# EAGLE board SparkFun_Qwiic_Distance - VL53L4CD-Panel (EAGLE 9.5.1), part 1 of 3
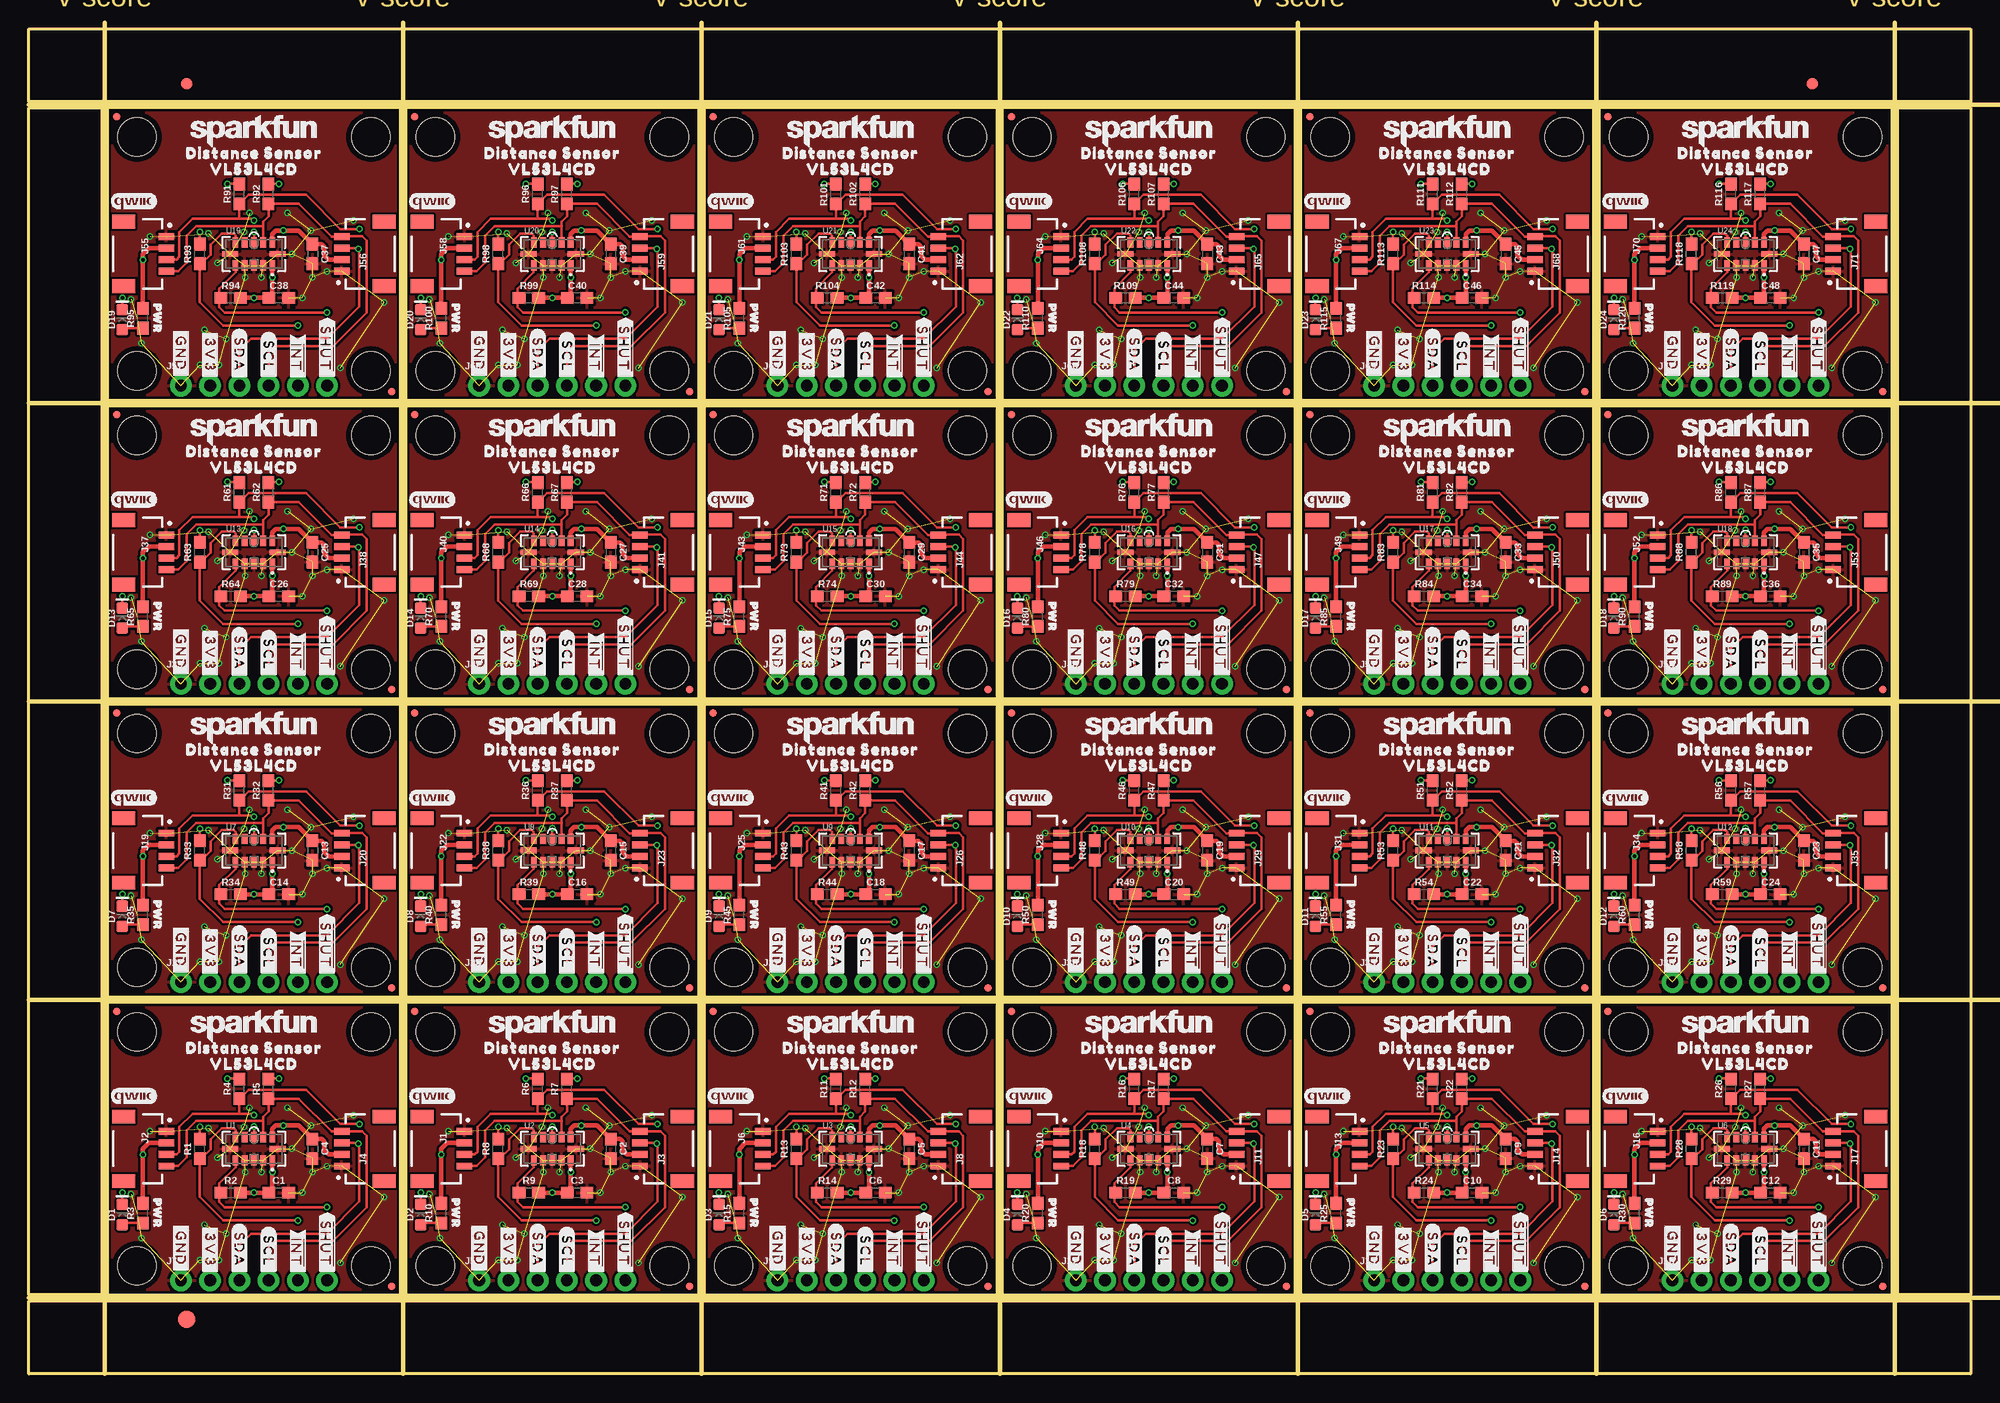
[diagram p0: board, top side]
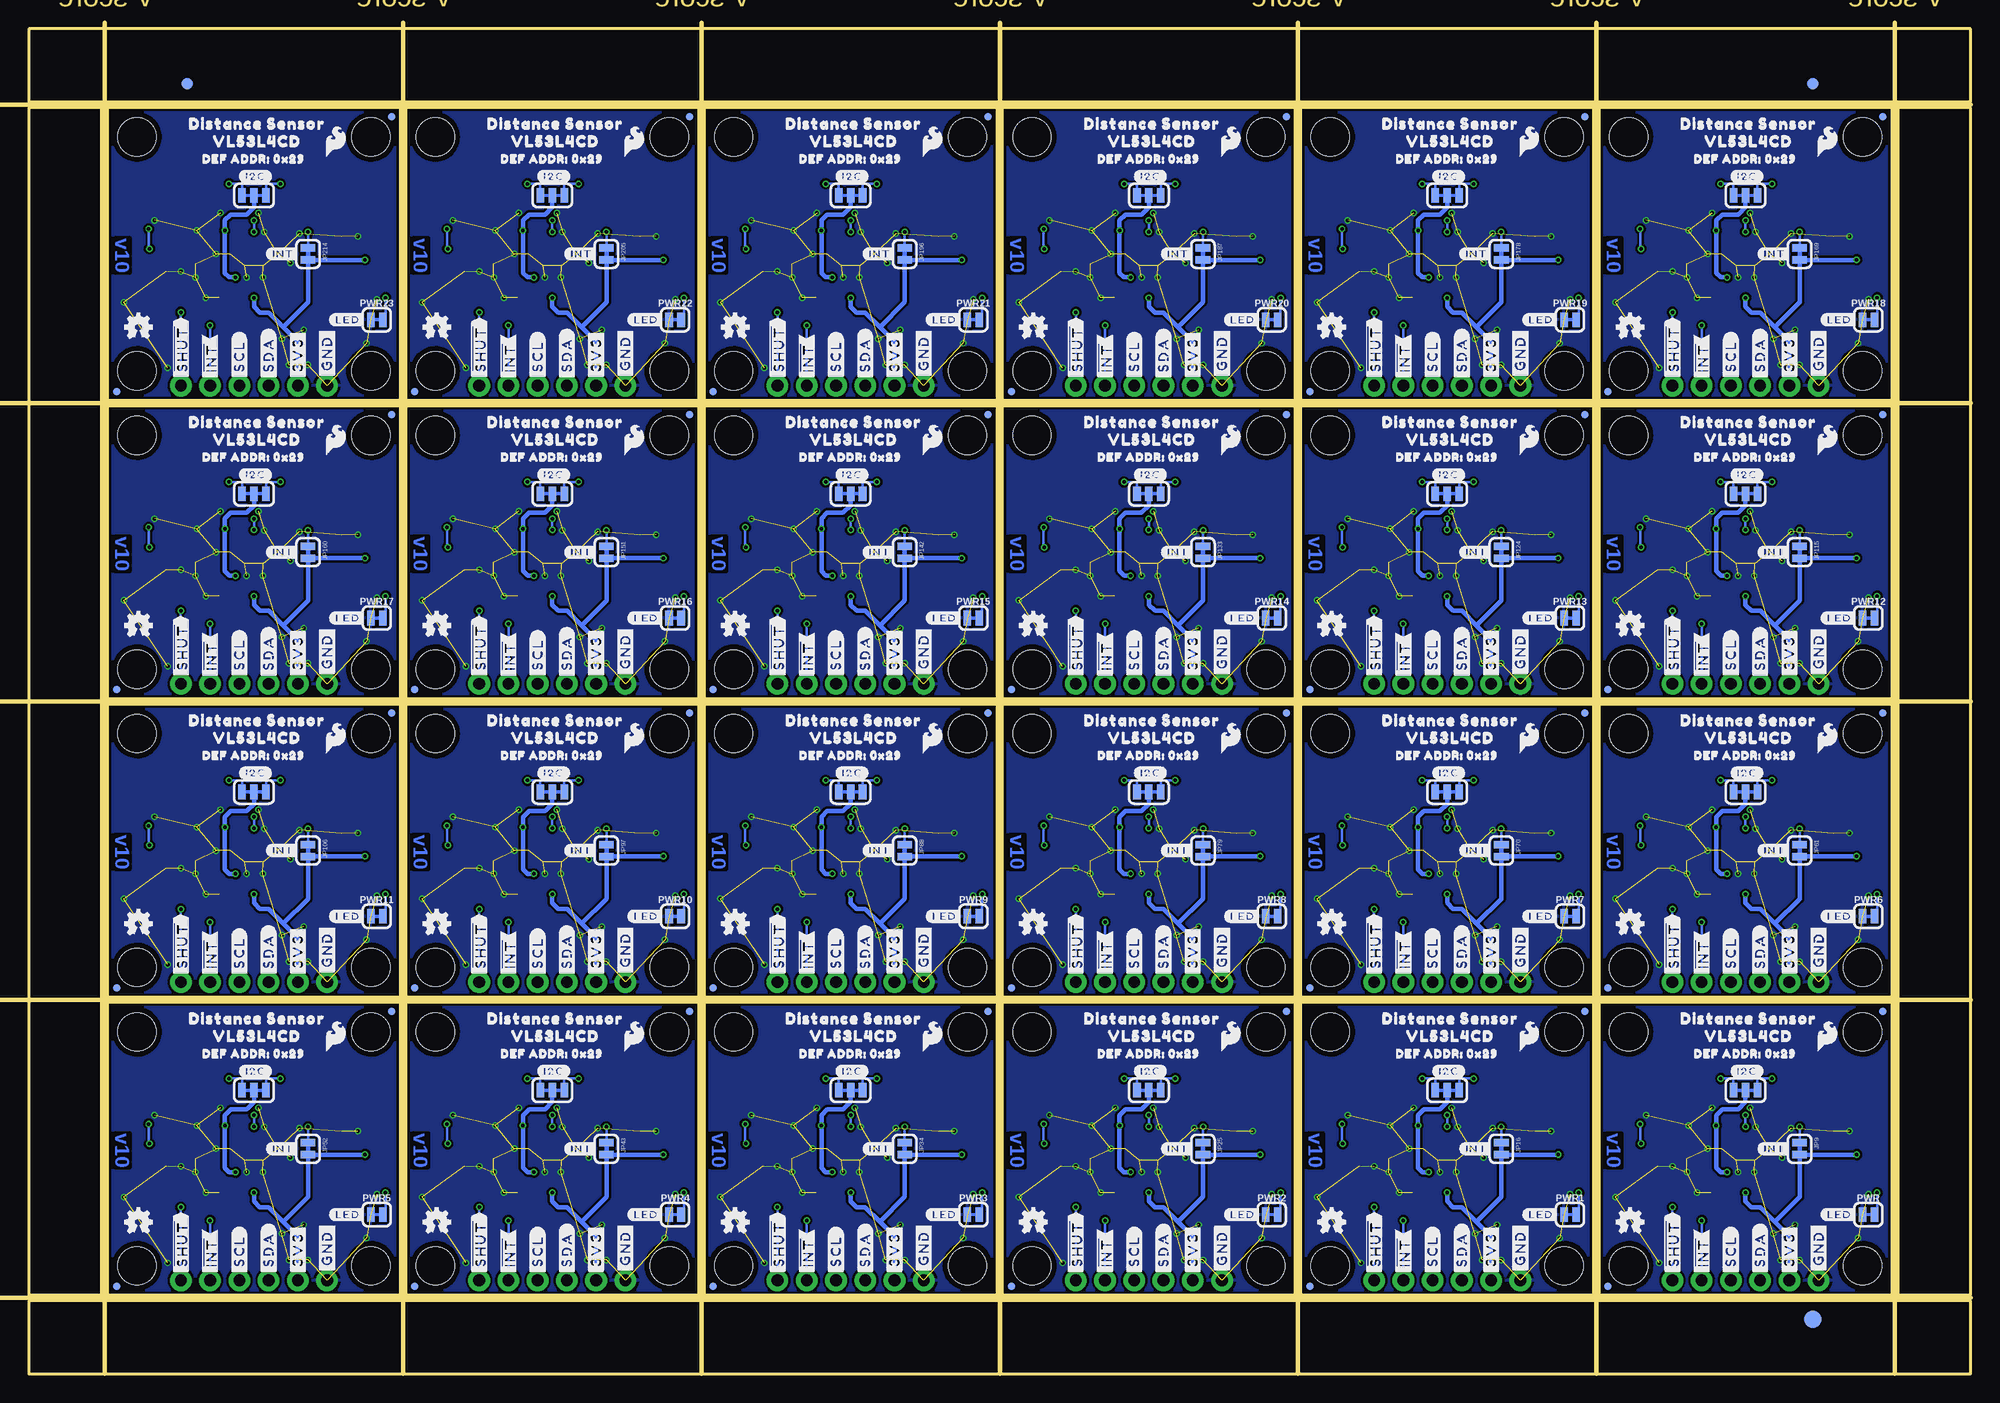
[diagram p1: board, bottom side, seen from below]

Size 168.66 x 116.84 mm. Coordinates in mm from the lower left corner, seen from the top.
Outline: 6.86,6.86 6.86,32.26 32.26,32.26 32.26,6.86 6.86,6.86
Outline: 32.77,6.86 32.77,32.26 58.17,32.26 58.17,6.86 32.77,6.86
Outline: 58.67,6.86 58.67,32.26 84.07,32.26 84.07,6.86 58.67,6.86
Outline: 84.58,6.86 84.58,32.26 109.98,32.26 109.98,6.86 84.58,6.86
Outline: 110.49,6.86 110.49,32.26 135.89,32.26 135.89,6.86 110.49,6.86
Outline: 136.4,6.86 136.4,32.26 161.8,32.26 161.8,6.86 136.4,6.86
Outline: 6.86,32.77 6.86,58.17 32.26,58.17 32.26,32.77 6.86,32.77
Outline: 32.77,32.77 32.77,58.17 58.17,58.17 58.17,32.77 32.77,32.77
Outline: 58.67,32.77 58.67,58.17 84.07,58.17 84.07,32.77 58.67,32.77
Outline: 84.58,32.77 84.58,58.17 109.98,58.17 109.98,32.77 84.58,32.77
Outline: 110.49,32.77 110.49,58.17 135.89,58.17 135.89,32.77 110.49,32.77
Outline: 136.4,32.77 136.4,58.17 161.8,58.17 161.8,32.77 136.4,32.77
Outline: 6.86,58.67 6.86,84.07 32.26,84.07 32.26,58.67 6.86,58.67
Outline: 32.77,58.67 32.77,84.07 58.17,84.07 58.17,58.67 32.77,58.67
Outline: 58.67,58.67 58.67,84.07 84.07,84.07 84.07,58.67 58.67,58.67
Outline: 84.58,58.67 84.58,84.07 109.98,84.07 109.98,58.67 84.58,58.67
Outline: 110.49,58.67 110.49,84.07 135.89,84.07 135.89,58.67 110.49,58.67
Outline: 136.4,58.67 136.4,84.07 161.8,84.07 161.8,58.67 136.4,58.67
Outline: 6.86,84.58 6.86,109.98 32.26,109.98 32.26,84.58 6.86,84.58
Outline: 32.77,84.58 32.77,109.98 58.17,109.98 58.17,84.58 32.77,84.58
Outline: 58.67,84.58 58.67,109.98 84.07,109.98 84.07,84.58 58.67,84.58
Outline: 84.58,84.58 84.58,109.98 109.98,109.98 109.98,84.58 84.58,84.58
Outline: 110.49,84.58 110.49,109.98 135.89,109.98 135.89,84.58 110.49,84.58
Outline: 136.4,84.58 136.4,109.98 161.8,109.98 161.8,84.58 136.4,84.58
Outline: 0,6.35 168.66,6.35 168.66,0 0,0 0,6.35
Outline: 162.31,109.98 168.66,109.98 168.66,6.86 162.31,6.86 162.31,109.98
Outline: 0,116.84 168.66,116.84 168.66,110.49 0,110.49 0,116.84
Outline: 0,109.98 6.35,109.98 6.35,6.86 0,6.86 0,109.98
Copper layers (1*16): Top 0.035mm / dielectric 1.5mm / Bottom 0.035mm
Design rules "SparkFun_Qwiic_Distance - VL53L4CD": minimum track width 4mil, minimum drill 6mil, track to track 4mil, track to pad 4mil, pad to pad 4mil, via to via 4mil, smd to smd 4mil, copper to edge 4mil, drill to drill 4mil, minimum pad ring 5mil, minimum via ring 5mil, stop-mask expansion 4mil, vias tented up to drill 25mil, thermal gap 10mil
Milling: 12 lines

## Footprints (pad centres in the part's own frame; a part is rotated, then mirrored left to right if it is on the bottom)
0603 = smd 1.1 x 1: 1 -0.85,0; 2 0.85,0
LED-0603 = smd 1 x 1: A -0.877,0; C 0.877,0
FIDUCIAL-1X2 = smd 1 x 1: 1 0,0
FIDUCIAL-1.5X3 = smd 1.5 x 1.5: 1 0,0
SMT-JUMPER_3_2-NC_TRACE_SILK = smd 0.66 x 1.27: 1 -1.041,0; 2 0,0; 3 1.041,0
JST04_1MM_RA = smd 0.6 x 1.35: 1 -1.5,0; 2 -0.5,0; 3 0.5,0; 4 1.5,0 | smd 1.2 x 2: NC1 2.8,-3.675; NC2 -2.8,-3.675
1X06_NO_SILK = drill 1.016 pad 1.88: 1 0,0; 2 2.54,0; 3 5.08,0; 4 7.62,0; 5 10.16,0; 6 12.7,0
MICRO-FIDUCIAL = smd 0.635 x 0.635: 1 0,0
STAND-OFF = hole 3.302: 0,0
SMT-JUMPER_2_NC_TRACE_SILK = smd 0.66 x 1.27: 1 -0.521,0; 2 0.521,0
VL53L4CX = smd 0.5 x 0.9: 1 1.6,-1; 2 0.8,-1; 3 0,-1; 4 -0.8,-1; 5 -1.6,-1; 7 -1.6,1; 8 -0.8,1; 9 0,1; 10 0.8,1; 11 1.6,1 | smd 1.4 x 0.5: 6 -2.05,0; 12 2.05,0

## Placement (x,y rotation side)
C1  4.7uF  [0603]  21.72,15.75 0 top
C2  0.1uF  [0603]  50.55,19.56 270 top
C3  4.7uF  [0603]  47.62,15.75 0 top
C4  0.1uF  [0603]  24.64,19.56 270 top
C5  0.1uF  [0603]  76.45,19.56 270 top
C6  4.7uF  [0603]  73.53,15.75 0 top
C7  0.1uF  [0603]  102.36,19.56 270 top
C8  4.7uF  [0603]  99.44,15.75 0 top
C9  0.1uF  [0603]  128.27,19.56 270 top
C10  4.7uF  [0603]  125.35,15.75 0 top
C11  0.1uF  [0603]  154.18,19.56 270 top
C12  4.7uF  [0603]  151.26,15.75 0 top
C13  0.1uF  [0603]  24.64,45.47 270 top
C14  4.7uF  [0603]  21.72,41.66 0 top
C15  0.1uF  [0603]  50.55,45.47 270 top
C16  4.7uF  [0603]  47.62,41.66 0 top
C17  0.1uF  [0603]  76.45,45.47 270 top
C18  4.7uF  [0603]  73.53,41.66 0 top
C19  0.1uF  [0603]  102.36,45.47 270 top
C20  4.7uF  [0603]  99.44,41.66 0 top
C21  0.1uF  [0603]  128.27,45.47 270 top
C22  4.7uF  [0603]  125.35,41.66 0 top
C23  0.1uF  [0603]  154.18,45.47 270 top
C24  4.7uF  [0603]  151.26,41.66 0 top
C25  0.1uF  [0603]  24.64,71.37 270 top
C26  4.7uF  [0603]  21.72,67.56 0 top
C27  0.1uF  [0603]  50.55,71.37 270 top
C28  4.7uF  [0603]  47.62,67.56 0 top
C29  0.1uF  [0603]  76.45,71.37 270 top
C30  4.7uF  [0603]  73.53,67.56 0 top
C31  0.1uF  [0603]  102.36,71.37 270 top
C32  4.7uF  [0603]  99.44,67.56 0 top
C33  0.1uF  [0603]  128.27,71.37 270 top
C34  4.7uF  [0603]  125.35,67.56 0 top
C35  0.1uF  [0603]  154.18,71.37 270 top
C36  4.7uF  [0603]  151.26,67.56 0 top
C37  0.1uF  [0603]  24.64,97.28 270 top
C38  4.7uF  [0603]  21.72,93.47 0 top
C39  0.1uF  [0603]  50.55,97.28 270 top
C40  4.7uF  [0603]  47.62,93.47 0 top
C41  0.1uF  [0603]  76.45,97.28 270 top
C42  4.7uF  [0603]  73.53,93.47 0 top
C43  0.1uF  [0603]  102.36,97.28 270 top
C44  4.7uF  [0603]  99.44,93.47 0 top
C45  0.1uF  [0603]  128.27,97.28 270 top
C46  4.7uF  [0603]  125.35,93.47 0 top
C47  0.1uF  [0603]  154.18,97.28 270 top
C48  4.7uF  [0603]  151.26,93.47 0 top
D1  RED  [LED-0603]  8.13,13.84 90 top
D2  RED  [LED-0603]  34.04,13.84 90 top
D3  RED  [LED-0603]  59.94,13.84 90 top
D4  RED  [LED-0603]  85.85,13.84 90 top
D5  RED  [LED-0603]  111.76,13.84 90 top
D6  RED  [LED-0603]  137.67,13.84 90 top
D7  RED  [LED-0603]  8.13,39.75 90 top
D8  RED  [LED-0603]  34.04,39.75 90 top
D9  RED  [LED-0603]  59.94,39.75 90 top
D10  RED  [LED-0603]  85.85,39.75 90 top
D11  RED  [LED-0603]  111.76,39.75 90 top
D12  RED  [LED-0603]  137.67,39.75 90 top
D13  RED  [LED-0603]  8.13,65.66 90 top
D14  RED  [LED-0603]  34.04,65.66 90 top
D15  RED  [LED-0603]  59.94,65.66 90 top
D16  RED  [LED-0603]  85.85,65.66 90 top
D17  RED  [LED-0603]  111.76,65.66 90 top
D18  RED  [LED-0603]  137.67,65.66 90 top
D19  RED  [LED-0603]  8.13,91.57 90 top
D20  RED  [LED-0603]  34.04,91.57 90 top
D21  RED  [LED-0603]  59.94,91.57 90 top
D22  RED  [LED-0603]  85.85,91.57 90 top
D23  RED  [LED-0603]  111.76,91.57 90 top
D24  RED  [LED-0603]  137.67,91.57 90 top
E$1  [FIDUCIAL-1X2]  13.72,112.08 0 top
E$2  [FIDUCIAL-1X2]  13.72,112.08 0 bottom
E$3  [FIDUCIAL-1X2]  154.88,112.08 0 top
E$4  [FIDUCIAL-1X2]  154.88,112.08 0 bottom
E$5  [FIDUCIAL-1.5X3]  13.72,4.76 0 top
E$6  [FIDUCIAL-1.5X3]  13.72,4.76 0 bottom
I2C  JUMPER-SMT_3_2-NC_TRACE_SILK  [SMT-JUMPER_3_2-NC_TRACE_SILK]  19.56,24.64 0 bottom
I2C1  JUMPER-SMT_3_2-NC_TRACE_SILK  [SMT-JUMPER_3_2-NC_TRACE_SILK]  45.47,24.64 0 bottom
I2C2  JUMPER-SMT_3_2-NC_TRACE_SILK  [SMT-JUMPER_3_2-NC_TRACE_SILK]  71.37,24.64 0 bottom
I2C3  JUMPER-SMT_3_2-NC_TRACE_SILK  [SMT-JUMPER_3_2-NC_TRACE_SILK]  97.28,24.64 0 bottom
I2C4  JUMPER-SMT_3_2-NC_TRACE_SILK  [SMT-JUMPER_3_2-NC_TRACE_SILK]  123.19,24.64 0 bottom
I2C5  JUMPER-SMT_3_2-NC_TRACE_SILK  [SMT-JUMPER_3_2-NC_TRACE_SILK]  149.1,24.64 0 bottom
I2C6  JUMPER-SMT_3_2-NC_TRACE_SILK  [SMT-JUMPER_3_2-NC_TRACE_SILK]  19.56,50.55 0 bottom
I2C7  JUMPER-SMT_3_2-NC_TRACE_SILK  [SMT-JUMPER_3_2-NC_TRACE_SILK]  45.47,50.55 0 bottom
I2C8  JUMPER-SMT_3_2-NC_TRACE_SILK  [SMT-JUMPER_3_2-NC_TRACE_SILK]  71.37,50.55 0 bottom
I2C9  JUMPER-SMT_3_2-NC_TRACE_SILK  [SMT-JUMPER_3_2-NC_TRACE_SILK]  97.28,50.55 0 bottom
I2C10  JUMPER-SMT_3_2-NC_TRACE_SILK  [SMT-JUMPER_3_2-NC_TRACE_SILK]  123.19,50.55 0 bottom
I2C11  JUMPER-SMT_3_2-NC_TRACE_SILK  [SMT-JUMPER_3_2-NC_TRACE_SILK]  149.1,50.55 0 bottom
I2C12  JUMPER-SMT_3_2-NC_TRACE_SILK  [SMT-JUMPER_3_2-NC_TRACE_SILK]  19.56,76.45 0 bottom
I2C13  JUMPER-SMT_3_2-NC_TRACE_SILK  [SMT-JUMPER_3_2-NC_TRACE_SILK]  45.47,76.45 0 bottom
I2C14  JUMPER-SMT_3_2-NC_TRACE_SILK  [SMT-JUMPER_3_2-NC_TRACE_SILK]  71.37,76.45 0 bottom
I2C15  JUMPER-SMT_3_2-NC_TRACE_SILK  [SMT-JUMPER_3_2-NC_TRACE_SILK]  97.28,76.45 0 bottom
I2C16  JUMPER-SMT_3_2-NC_TRACE_SILK  [SMT-JUMPER_3_2-NC_TRACE_SILK]  123.19,76.45 0 bottom
I2C17  JUMPER-SMT_3_2-NC_TRACE_SILK  [SMT-JUMPER_3_2-NC_TRACE_SILK]  149.1,76.45 0 bottom
I2C18  JUMPER-SMT_3_2-NC_TRACE_SILK  [SMT-JUMPER_3_2-NC_TRACE_SILK]  19.56,102.36 0 bottom
I2C19  JUMPER-SMT_3_2-NC_TRACE_SILK  [SMT-JUMPER_3_2-NC_TRACE_SILK]  45.47,102.36 0 bottom
I2C20  JUMPER-SMT_3_2-NC_TRACE_SILK  [SMT-JUMPER_3_2-NC_TRACE_SILK]  71.37,102.36 0 bottom
I2C21  JUMPER-SMT_3_2-NC_TRACE_SILK  [SMT-JUMPER_3_2-NC_TRACE_SILK]  97.28,102.36 0 bottom
I2C22  JUMPER-SMT_3_2-NC_TRACE_SILK  [SMT-JUMPER_3_2-NC_TRACE_SILK]  123.19,102.36 0 bottom
I2C23  JUMPER-SMT_3_2-NC_TRACE_SILK  [SMT-JUMPER_3_2-NC_TRACE_SILK]  149.1,102.36 0 bottom
J1  QWIIC_RIGHT_ANGLE  [JST04_1MM_RA]  37.85,19.56 270 top
J2  QWIIC_RIGHT_ANGLE  [JST04_1MM_RA]  11.94,19.56 270 top
J3  QWIIC_RIGHT_ANGLE  [JST04_1MM_RA]  53.09,19.56 90 top
J4  QWIIC_RIGHT_ANGLE  [JST04_1MM_RA]  27.18,19.56 90 top
J5  [1X06_NO_SILK]  39.12,8.13 0 top
J6  QWIIC_RIGHT_ANGLE  [JST04_1MM_RA]  63.75,19.56 270 top
J7  [1X06_NO_SILK]  13.21,8.13 0 top
J8  QWIIC_RIGHT_ANGLE  [JST04_1MM_RA]  78.99,19.56 90 top
J9  [1X06_NO_SILK]  65.02,8.13 0 top
J10  QWIIC_RIGHT_ANGLE  [JST04_1MM_RA]  89.66,19.56 270 top
J11  QWIIC_RIGHT_ANGLE  [JST04_1MM_RA]  104.9,19.56 90 top
J12  [1X06_NO_SILK]  90.93,8.13 0 top
J13  QWIIC_RIGHT_ANGLE  [JST04_1MM_RA]  115.57,19.56 270 top
J14  QWIIC_RIGHT_ANGLE  [JST04_1MM_RA]  130.81,19.56 90 top
J15  [1X06_NO_SILK]  116.84,8.13 0 top
J16  QWIIC_RIGHT_ANGLE  [JST04_1MM_RA]  141.48,19.56 270 top
J17  QWIIC_RIGHT_ANGLE  [JST04_1MM_RA]  156.72,19.56 90 top
J18  [1X06_NO_SILK]  142.75,8.13 0 top
J19  QWIIC_RIGHT_ANGLE  [JST04_1MM_RA]  11.94,45.47 270 top
J20  QWIIC_RIGHT_ANGLE  [JST04_1MM_RA]  27.18,45.47 90 top
J21  [1X06_NO_SILK]  13.21,34.04 0 top
J22  QWIIC_RIGHT_ANGLE  [JST04_1MM_RA]  37.85,45.47 270 top
J23  QWIIC_RIGHT_ANGLE  [JST04_1MM_RA]  53.09,45.47 90 top
J24  [1X06_NO_SILK]  39.12,34.04 0 top
J25  QWIIC_RIGHT_ANGLE  [JST04_1MM_RA]  63.75,45.47 270 top
J26  QWIIC_RIGHT_ANGLE  [JST04_1MM_RA]  78.99,45.47 90 top
J27  [1X06_NO_SILK]  65.02,34.04 0 top
J28  QWIIC_RIGHT_ANGLE  [JST04_1MM_RA]  89.66,45.47 270 top
J29  QWIIC_RIGHT_ANGLE  [JST04_1MM_RA]  104.9,45.47 90 top
J30  [1X06_NO_SILK]  90.93,34.04 0 top
J31  QWIIC_RIGHT_ANGLE  [JST04_1MM_RA]  115.57,45.47 270 top
J32  QWIIC_RIGHT_ANGLE  [JST04_1MM_RA]  130.81,45.47 90 top
J33  [1X06_NO_SILK]  116.84,34.04 0 top
J34  QWIIC_RIGHT_ANGLE  [JST04_1MM_RA]  141.48,45.47 270 top
J35  QWIIC_RIGHT_ANGLE  [JST04_1MM_RA]  156.72,45.47 90 top
J36  [1X06_NO_SILK]  142.75,34.04 0 top
J37  QWIIC_RIGHT_ANGLE  [JST04_1MM_RA]  11.94,71.37 270 top
J38  QWIIC_RIGHT_ANGLE  [JST04_1MM_RA]  27.18,71.37 90 top
J39  [1X06_NO_SILK]  13.21,59.94 0 top
J40  QWIIC_RIGHT_ANGLE  [JST04_1MM_RA]  37.85,71.37 270 top
J41  QWIIC_RIGHT_ANGLE  [JST04_1MM_RA]  53.09,71.37 90 top
J42  [1X06_NO_SILK]  39.12,59.94 0 top
J43  QWIIC_RIGHT_ANGLE  [JST04_1MM_RA]  63.75,71.37 270 top
J44  QWIIC_RIGHT_ANGLE  [JST04_1MM_RA]  78.99,71.37 90 top
J45  [1X06_NO_SILK]  65.02,59.94 0 top
J46  QWIIC_RIGHT_ANGLE  [JST04_1MM_RA]  89.66,71.37 270 top
J47  QWIIC_RIGHT_ANGLE  [JST04_1MM_RA]  104.9,71.37 90 top
J48  [1X06_NO_SILK]  90.93,59.94 0 top
J49  QWIIC_RIGHT_ANGLE  [JST04_1MM_RA]  115.57,71.37 270 top
J50  QWIIC_RIGHT_ANGLE  [JST04_1MM_RA]  130.81,71.37 90 top
J51  [1X06_NO_SILK]  116.84,59.94 0 top
J52  QWIIC_RIGHT_ANGLE  [JST04_1MM_RA]  141.48,71.37 270 top
J53  QWIIC_RIGHT_ANGLE  [JST04_1MM_RA]  156.72,71.37 90 top
J54  [1X06_NO_SILK]  142.75,59.94 0 top
J55  QWIIC_RIGHT_ANGLE  [JST04_1MM_RA]  11.94,97.28 270 top
J56  QWIIC_RIGHT_ANGLE  [JST04_1MM_RA]  27.18,97.28 90 top
J57  [1X06_NO_SILK]  13.21,85.85 0 top
J58  QWIIC_RIGHT_ANGLE  [JST04_1MM_RA]  37.85,97.28 270 top
J59  QWIIC_RIGHT_ANGLE  [JST04_1MM_RA]  53.09,97.28 90 top
J60  [1X06_NO_SILK]  39.12,85.85 0 top
J61  QWIIC_RIGHT_ANGLE  [JST04_1MM_RA]  63.75,97.28 270 top
J62  QWIIC_RIGHT_ANGLE  [JST04_1MM_RA]  78.99,97.28 90 top
J63  [1X06_NO_SILK]  65.02,85.85 0 top
J64  QWIIC_RIGHT_ANGLE  [JST04_1MM_RA]  89.66,97.28 270 top
J65  QWIIC_RIGHT_ANGLE  [JST04_1MM_RA]  104.9,97.28 90 top
J66  [1X06_NO_SILK]  90.93,85.85 0 top
J67  QWIIC_RIGHT_ANGLE  [JST04_1MM_RA]  115.57,97.28 270 top
J68  QWIIC_RIGHT_ANGLE  [JST04_1MM_RA]  130.81,97.28 90 top
J69  [1X06_NO_SILK]  116.84,85.85 0 top
J70  QWIIC_RIGHT_ANGLE  [JST04_1MM_RA]  141.48,97.28 270 top
J71  QWIIC_RIGHT_ANGLE  [JST04_1MM_RA]  156.72,97.28 90 top
J72  [1X06_NO_SILK]  142.75,85.85 0 top
JP1  FIDUCIALUFIDUCIAL  [MICRO-FIDUCIAL]  7.62,31.5 0 bottom
JP2  FIDUCIALUFIDUCIAL  [MICRO-FIDUCIAL]  31.5,7.62 0 top
JP3  STAND-OFF  [STAND-OFF]  9.4,29.72 0 top
JP4  STAND-OFF  [STAND-OFF]  29.72,29.72 0 top
JP5  FIDUCIALUFIDUCIAL  [MICRO-FIDUCIAL]  31.5,7.62 0 bottom
JP6  FIDUCIALUFIDUCIAL  [MICRO-FIDUCIAL]  7.62,31.5 0 top
JP7  STAND-OFF  [STAND-OFF]  9.4,9.4 0 top
JP8  STAND-OFF  [STAND-OFF]  29.72,9.4 0 top
JP9  INT  [SMT-JUMPER_2_NC_TRACE_SILK]  14.86,19.56 270 bottom
JP10  STAND-OFF  [STAND-OFF]  35.31,29.72 0 top
JP11  STAND-OFF  [STAND-OFF]  55.63,29.72 0 top
JP12  FIDUCIALUFIDUCIAL  [MICRO-FIDUCIAL]  57.4,7.62 0 top
JP13  FIDUCIALUFIDUCIAL  [MICRO-FIDUCIAL]  33.53,31.5 0 top
JP14  FIDUCIALUFIDUCIAL  [MICRO-FIDUCIAL]  33.53,31.5 0 bottom
JP15  FIDUCIALUFIDUCIAL  [MICRO-FIDUCIAL]  57.4,7.62 0 bottom
JP16  INT  [SMT-JUMPER_2_NC_TRACE_SILK]  40.77,19.56 270 bottom
JP17  STAND-OFF  [STAND-OFF]  35.31,9.4 0 top
JP18  STAND-OFF  [STAND-OFF]  55.63,9.4 0 top
JP19  STAND-OFF  [STAND-OFF]  61.21,29.72 0 top
JP20  STAND-OFF  [STAND-OFF]  81.53,29.72 0 top
JP21  FIDUCIALUFIDUCIAL  [MICRO-FIDUCIAL]  83.31,7.62 0 top
JP22  FIDUCIALUFIDUCIAL  [MICRO-FIDUCIAL]  59.44,31.5 0 top
JP23  FIDUCIALUFIDUCIAL  [MICRO-FIDUCIAL]  59.44,31.5 0 bottom
JP24  FIDUCIALUFIDUCIAL  [MICRO-FIDUCIAL]  83.31,7.62 0 bottom
JP25  INT  [SMT-JUMPER_2_NC_TRACE_SILK]  66.67,19.56 270 bottom
JP26  STAND-OFF  [STAND-OFF]  61.21,9.4 0 top
JP27  STAND-OFF  [STAND-OFF]  81.53,9.4 0 top
JP28  STAND-OFF  [STAND-OFF]  87.12,29.72 0 top
JP29  STAND-OFF  [STAND-OFF]  107.44,29.72 0 top
JP30  FIDUCIALUFIDUCIAL  [MICRO-FIDUCIAL]  109.22,7.62 0 top
JP31  FIDUCIALUFIDUCIAL  [MICRO-FIDUCIAL]  85.34,31.5 0 top
JP32  FIDUCIALUFIDUCIAL  [MICRO-FIDUCIAL]  85.34,31.5 0 bottom
JP33  FIDUCIALUFIDUCIAL  [MICRO-FIDUCIAL]  109.22,7.62 0 bottom
JP34  INT  [SMT-JUMPER_2_NC_TRACE_SILK]  92.58,19.56 270 bottom
JP35  STAND-OFF  [STAND-OFF]  87.12,9.4 0 top
JP36  STAND-OFF  [STAND-OFF]  107.44,9.4 0 top
JP37  STAND-OFF  [STAND-OFF]  113.03,29.72 0 top
JP38  STAND-OFF  [STAND-OFF]  133.35,29.72 0 top
JP39  FIDUCIALUFIDUCIAL  [MICRO-FIDUCIAL]  135.13,7.62 0 top
JP40  FIDUCIALUFIDUCIAL  [MICRO-FIDUCIAL]  111.25,31.5 0 top
JP41  FIDUCIALUFIDUCIAL  [MICRO-FIDUCIAL]  111.25,31.5 0 bottom
JP42  FIDUCIALUFIDUCIAL  [MICRO-FIDUCIAL]  135.13,7.62 0 bottom
JP43  INT  [SMT-JUMPER_2_NC_TRACE_SILK]  118.49,19.56 270 bottom
JP44  STAND-OFF  [STAND-OFF]  113.03,9.4 0 top
JP45  STAND-OFF  [STAND-OFF]  133.35,9.4 0 top
JP46  STAND-OFF  [STAND-OFF]  138.94,29.72 0 top
JP47  STAND-OFF  [STAND-OFF]  159.26,29.72 0 top
JP48  FIDUCIALUFIDUCIAL  [MICRO-FIDUCIAL]  161.04,7.62 0 top
JP49  FIDUCIALUFIDUCIAL  [MICRO-FIDUCIAL]  137.16,31.5 0 top
JP50  FIDUCIALUFIDUCIAL  [MICRO-FIDUCIAL]  137.16,31.5 0 bottom
JP51  FIDUCIALUFIDUCIAL  [MICRO-FIDUCIAL]  161.04,7.62 0 bottom
JP52  INT  [SMT-JUMPER_2_NC_TRACE_SILK]  144.4,19.56 270 bottom
JP53  STAND-OFF  [STAND-OFF]  138.94,9.4 0 top
JP54  STAND-OFF  [STAND-OFF]  159.26,9.4 0 top
JP55  STAND-OFF  [STAND-OFF]  9.4,55.63 0 top
JP56  STAND-OFF  [STAND-OFF]  29.72,55.63 0 top
JP57  FIDUCIALUFIDUCIAL  [MICRO-FIDUCIAL]  31.5,33.53 0 top
JP58  FIDUCIALUFIDUCIAL  [MICRO-FIDUCIAL]  7.62,57.4 0 top
JP59  FIDUCIALUFIDUCIAL  [MICRO-FIDUCIAL]  7.62,57.4 0 bottom
JP60  FIDUCIALUFIDUCIAL  [MICRO-FIDUCIAL]  31.5,33.53 0 bottom
JP61  INT  [SMT-JUMPER_2_NC_TRACE_SILK]  14.86,45.47 270 bottom
JP62  STAND-OFF  [STAND-OFF]  9.4,35.31 0 top
JP63  STAND-OFF  [STAND-OFF]  29.72,35.31 0 top
JP64  STAND-OFF  [STAND-OFF]  35.31,55.63 0 top
JP65  STAND-OFF  [STAND-OFF]  55.63,55.63 0 top
JP66  FIDUCIALUFIDUCIAL  [MICRO-FIDUCIAL]  57.4,33.53 0 top
JP67  FIDUCIALUFIDUCIAL  [MICRO-FIDUCIAL]  33.53,57.4 0 top
JP68  FIDUCIALUFIDUCIAL  [MICRO-FIDUCIAL]  33.53,57.4 0 bottom
JP69  FIDUCIALUFIDUCIAL  [MICRO-FIDUCIAL]  57.4,33.53 0 bottom
JP70  INT  [SMT-JUMPER_2_NC_TRACE_SILK]  40.77,45.47 270 bottom
JP71  STAND-OFF  [STAND-OFF]  35.31,35.31 0 top
JP72  STAND-OFF  [STAND-OFF]  55.63,35.31 0 top
JP73  STAND-OFF  [STAND-OFF]  61.21,55.63 0 top
JP74  STAND-OFF  [STAND-OFF]  81.53,55.63 0 top
JP75  FIDUCIALUFIDUCIAL  [MICRO-FIDUCIAL]  83.31,33.53 0 top
JP76  FIDUCIALUFIDUCIAL  [MICRO-FIDUCIAL]  59.44,57.4 0 top
JP77  FIDUCIALUFIDUCIAL  [MICRO-FIDUCIAL]  59.44,57.4 0 bottom
JP78  FIDUCIALUFIDUCIAL  [MICRO-FIDUCIAL]  83.31,33.53 0 bottom
JP79  INT  [SMT-JUMPER_2_NC_TRACE_SILK]  66.67,45.47 270 bottom
JP80  STAND-OFF  [STAND-OFF]  61.21,35.31 0 top
JP81  STAND-OFF  [STAND-OFF]  81.53,35.31 0 top
JP82  STAND-OFF  [STAND-OFF]  87.12,55.63 0 top
JP83  STAND-OFF  [STAND-OFF]  107.44,55.63 0 top
JP84  FIDUCIALUFIDUCIAL  [MICRO-FIDUCIAL]  109.22,33.53 0 top
JP85  FIDUCIALUFIDUCIAL  [MICRO-FIDUCIAL]  85.34,57.4 0 top
JP86  FIDUCIALUFIDUCIAL  [MICRO-FIDUCIAL]  85.34,57.4 0 bottom
JP87  FIDUCIALUFIDUCIAL  [MICRO-FIDUCIAL]  109.22,33.53 0 bottom
JP88  INT  [SMT-JUMPER_2_NC_TRACE_SILK]  92.58,45.47 270 bottom
JP89  STAND-OFF  [STAND-OFF]  87.12,35.31 0 top
JP90  STAND-OFF  [STAND-OFF]  107.44,35.31 0 top
JP91  STAND-OFF  [STAND-OFF]  113.03,55.63 0 top
JP92  STAND-OFF  [STAND-OFF]  133.35,55.63 0 top
JP93  FIDUCIALUFIDUCIAL  [MICRO-FIDUCIAL]  135.13,33.53 0 top
JP94  FIDUCIALUFIDUCIAL  [MICRO-FIDUCIAL]  111.25,57.4 0 top
JP95  FIDUCIALUFIDUCIAL  [MICRO-FIDUCIAL]  111.25,57.4 0 bottom
JP96  FIDUCIALUFIDUCIAL  [MICRO-FIDUCIAL]  135.13,33.53 0 bottom
JP97  INT  [SMT-JUMPER_2_NC_TRACE_SILK]  118.49,45.47 270 bottom
JP98  STAND-OFF  [STAND-OFF]  113.03,35.31 0 top
JP99  STAND-OFF  [STAND-OFF]  133.35,35.31 0 top
JP100  STAND-OFF  [STAND-OFF]  138.94,55.63 0 top
JP101  STAND-OFF  [STAND-OFF]  159.26,55.63 0 top
JP102  FIDUCIALUFIDUCIAL  [MICRO-FIDUCIAL]  161.04,33.53 0 top
JP103  FIDUCIALUFIDUCIAL  [MICRO-FIDUCIAL]  137.16,57.4 0 top
JP104  FIDUCIALUFIDUCIAL  [MICRO-FIDUCIAL]  137.16,57.4 0 bottom
JP105  FIDUCIALUFIDUCIAL  [MICRO-FIDUCIAL]  161.04,33.53 0 bottom
JP106  INT  [SMT-JUMPER_2_NC_TRACE_SILK]  144.4,45.47 270 bottom
JP107  STAND-OFF  [STAND-OFF]  138.94,35.31 0 top
JP108  STAND-OFF  [STAND-OFF]  159.26,35.31 0 top
JP109  STAND-OFF  [STAND-OFF]  9.4,81.53 0 top
JP110  STAND-OFF  [STAND-OFF]  29.72,81.53 0 top
JP111  FIDUCIALUFIDUCIAL  [MICRO-FIDUCIAL]  31.5,59.44 0 top
JP112  FIDUCIALUFIDUCIAL  [MICRO-FIDUCIAL]  7.62,83.31 0 top
JP113  FIDUCIALUFIDUCIAL  [MICRO-FIDUCIAL]  7.62,83.31 0 bottom
JP114  FIDUCIALUFIDUCIAL  [MICRO-FIDUCIAL]  31.5,59.44 0 bottom
JP115  INT  [SMT-JUMPER_2_NC_TRACE_SILK]  14.86,71.37 270 bottom
JP116  STAND-OFF  [STAND-OFF]  9.4,61.21 0 top
JP117  STAND-OFF  [STAND-OFF]  29.72,61.21 0 top
JP118  STAND-OFF  [STAND-OFF]  35.31,81.53 0 top
JP119  STAND-OFF  [STAND-OFF]  55.63,81.53 0 top
JP120  FIDUCIALUFIDUCIAL  [MICRO-FIDUCIAL]  57.4,59.44 0 top
JP121  FIDUCIALUFIDUCIAL  [MICRO-FIDUCIAL]  33.53,83.31 0 top
JP122  FIDUCIALUFIDUCIAL  [MICRO-FIDUCIAL]  33.53,83.31 0 bottom
JP123  FIDUCIALUFIDUCIAL  [MICRO-FIDUCIAL]  57.4,59.44 0 bottom
JP124  INT  [SMT-JUMPER_2_NC_TRACE_SILK]  40.77,71.37 270 bottom
JP125  STAND-OFF  [STAND-OFF]  35.31,61.21 0 top
JP126  STAND-OFF  [STAND-OFF]  55.63,61.21 0 top
JP127  STAND-OFF  [STAND-OFF]  61.21,81.53 0 top
JP128  STAND-OFF  [STAND-OFF]  81.53,81.53 0 top
JP129  FIDUCIALUFIDUCIAL  [MICRO-FIDUCIAL]  83.31,59.44 0 top
JP130  FIDUCIALUFIDUCIAL  [MICRO-FIDUCIAL]  59.44,83.31 0 top
JP131  FIDUCIALUFIDUCIAL  [MICRO-FIDUCIAL]  59.44,83.31 0 bottom
JP132  FIDUCIALUFIDUCIAL  [MICRO-FIDUCIAL]  83.31,59.44 0 bottom
JP133  INT  [SMT-JUMPER_2_NC_TRACE_SILK]  66.67,71.37 270 bottom
JP134  STAND-OFF  [STAND-OFF]  61.21,61.21 0 top
JP135  STAND-OFF  [STAND-OFF]  81.53,61.21 0 top
JP136  STAND-OFF  [STAND-OFF]  87.12,81.53 0 top
JP137  STAND-OFF  [STAND-OFF]  107.44,81.53 0 top
JP138  FIDUCIALUFIDUCIAL  [MICRO-FIDUCIAL]  109.22,59.44 0 top
JP139  FIDUCIALUFIDUCIAL  [MICRO-FIDUCIAL]  85.34,83.31 0 top
JP140  FIDUCIALUFIDUCIAL  [MICRO-FIDUCIAL]  85.34,83.31 0 bottom
JP141  FIDUCIALUFIDUCIAL  [MICRO-FIDUCIAL]  109.22,59.44 0 bottom
JP142  INT  [SMT-JUMPER_2_NC_TRACE_SILK]  92.58,71.37 270 bottom
JP143  STAND-OFF  [STAND-OFF]  87.12,61.21 0 top
JP144  STAND-OFF  [STAND-OFF]  107.44,61.21 0 top
JP145  STAND-OFF  [STAND-OFF]  113.03,81.53 0 top
JP146  STAND-OFF  [STAND-OFF]  133.35,81.53 0 top
JP147  FIDUCIALUFIDUCIAL  [MICRO-FIDUCIAL]  135.13,59.44 0 top
JP148  FIDUCIALUFIDUCIAL  [MICRO-FIDUCIAL]  111.25,83.31 0 top
JP149  FIDUCIALUFIDUCIAL  [MICRO-FIDUCIAL]  111.25,83.31 0 bottom
JP150  FIDUCIALUFIDUCIAL  [MICRO-FIDUCIAL]  135.13,59.44 0 bottom
JP151  INT  [SMT-JUMPER_2_NC_TRACE_SILK]  118.49,71.37 270 bottom
JP152  STAND-OFF  [STAND-OFF]  113.03,61.21 0 top
JP153  STAND-OFF  [STAND-OFF]  133.35,61.21 0 top
JP154  STAND-OFF  [STAND-OFF]  138.94,81.53 0 top
JP155  STAND-OFF  [STAND-OFF]  159.26,81.53 0 top
JP156  FIDUCIALUFIDUCIAL  [MICRO-FIDUCIAL]  161.04,59.44 0 top
JP157  FIDUCIALUFIDUCIAL  [MICRO-FIDUCIAL]  137.16,83.31 0 top
JP158  FIDUCIALUFIDUCIAL  [MICRO-FIDUCIAL]  137.16,83.31 0 bottom
JP159  FIDUCIALUFIDUCIAL  [MICRO-FIDUCIAL]  161.04,59.44 0 bottom
JP160  INT  [SMT-JUMPER_2_NC_TRACE_SILK]  144.4,71.37 270 bottom
JP161  STAND-OFF  [STAND-OFF]  138.94,61.21 0 top
JP162  STAND-OFF  [STAND-OFF]  159.26,61.21 0 top
JP163  STAND-OFF  [STAND-OFF]  9.4,107.44 0 top
JP164  STAND-OFF  [STAND-OFF]  29.72,107.44 0 top
JP165  FIDUCIALUFIDUCIAL  [MICRO-FIDUCIAL]  31.5,85.34 0 top
JP166  FIDUCIALUFIDUCIAL  [MICRO-FIDUCIAL]  7.62,109.22 0 top
JP167  FIDUCIALUFIDUCIAL  [MICRO-FIDUCIAL]  7.62,109.22 0 bottom
JP168  FIDUCIALUFIDUCIAL  [MICRO-FIDUCIAL]  31.5,85.34 0 bottom
JP169  INT  [SMT-JUMPER_2_NC_TRACE_SILK]  14.86,97.28 270 bottom
JP170  STAND-OFF  [STAND-OFF]  9.4,87.12 0 top
JP171  STAND-OFF  [STAND-OFF]  29.72,87.12 0 top
JP172  STAND-OFF  [STAND-OFF]  35.31,107.44 0 top
JP173  STAND-OFF  [STAND-OFF]  55.63,107.44 0 top
JP174  FIDUCIALUFIDUCIAL  [MICRO-FIDUCIAL]  57.4,85.34 0 top
JP175  FIDUCIALUFIDUCIAL  [MICRO-FIDUCIAL]  33.53,109.22 0 top
JP176  FIDUCIALUFIDUCIAL  [MICRO-FIDUCIAL]  33.53,109.22 0 bottom
JP177  FIDUCIALUFIDUCIAL  [MICRO-FIDUCIAL]  57.4,85.34 0 bottom
JP178  INT  [SMT-JUMPER_2_NC_TRACE_SILK]  40.77,97.28 270 bottom
JP179  STAND-OFF  [STAND-OFF]  35.31,87.12 0 top
JP180  STAND-OFF  [STAND-OFF]  55.63,87.12 0 top
JP181  STAND-OFF  [STAND-OFF]  61.21,107.44 0 top
JP182  STAND-OFF  [STAND-OFF]  81.53,107.44 0 top
JP183  FIDUCIALUFIDUCIAL  [MICRO-FIDUCIAL]  83.31,85.34 0 top
JP184  FIDUCIALUFIDUCIAL  [MICRO-FIDUCIAL]  59.44,109.22 0 top
JP185  FIDUCIALUFIDUCIAL  [MICRO-FIDUCIAL]  59.44,109.22 0 bottom
JP186  FIDUCIALUFIDUCIAL  [MICRO-FIDUCIAL]  83.31,85.34 0 bottom
JP187  INT  [SMT-JUMPER_2_NC_TRACE_SILK]  66.67,97.28 270 bottom
JP188  STAND-OFF  [STAND-OFF]  61.21,87.12 0 top
JP189  STAND-OFF  [STAND-OFF]  81.53,87.12 0 top
JP190  STAND-OFF  [STAND-OFF]  87.12,107.44 0 top
JP191  STAND-OFF  [STAND-OFF]  107.44,107.44 0 top
JP192  FIDUCIALUFIDUCIAL  [MICRO-FIDUCIAL]  109.22,85.34 0 top
JP193  FIDUCIALUFIDUCIAL  [MICRO-FIDUCIAL]  85.34,109.22 0 top
JP194  FIDUCIALUFIDUCIAL  [MICRO-FIDUCIAL]  85.34,109.22 0 bottom
JP195  FIDUCIALUFIDUCIAL  [MICRO-FIDUCIAL]  109.22,85.34 0 bottom
JP196  INT  [SMT-JUMPER_2_NC_TRACE_SILK]  92.58,97.28 270 bottom
JP197  STAND-OFF  [STAND-OFF]  87.12,87.12 0 top
JP198  STAND-OFF  [STAND-OFF]  107.44,87.12 0 top
JP199  STAND-OFF  [STAND-OFF]  113.03,107.44 0 top
JP200  STAND-OFF  [STAND-OFF]  133.35,107.44 0 top
JP201  FIDUCIALUFIDUCIAL  [MICRO-FIDUCIAL]  135.13,85.34 0 top
JP202  FIDUCIALUFIDUCIAL  [MICRO-FIDUCIAL]  111.25,109.22 0 top
JP203  FIDUCIALUFIDUCIAL  [MICRO-FIDUCIAL]  111.25,109.22 0 bottom
JP204  FIDUCIALUFIDUCIAL  [MICRO-FIDUCIAL]  135.13,85.34 0 bottom
JP205  INT  [SMT-JUMPER_2_NC_TRACE_SILK]  118.49,97.28 270 bottom
JP206  STAND-OFF  [STAND-OFF]  113.03,87.12 0 top
JP207  STAND-OFF  [STAND-OFF]  133.35,87.12 0 top
JP208  STAND-OFF  [STAND-OFF]  138.94,107.44 0 top
JP209  STAND-OFF  [STAND-OFF]  159.26,107.44 0 top
JP210  FIDUCIALUFIDUCIAL  [MICRO-FIDUCIAL]  161.04,85.34 0 top
JP211  FIDUCIALUFIDUCIAL  [MICRO-FIDUCIAL]  137.16,109.22 0 top
JP212  FIDUCIALUFIDUCIAL  [MICRO-FIDUCIAL]  137.16,109.22 0 bottom
JP213  FIDUCIALUFIDUCIAL  [MICRO-FIDUCIAL]  161.04,85.34 0 bottom
JP214  INT  [SMT-JUMPER_2_NC_TRACE_SILK]  144.4,97.28 270 bottom
JP215  STAND-OFF  [STAND-OFF]  138.94,87.12 0 top
JP216  STAND-OFF  [STAND-OFF]  159.26,87.12 0 top
LOGO1  OSHW-LOGOMINI  [OSHW-LOGO-MINI]  29.59,13.21 0 bottom
LOGO2  SFE_LOGO_NAME.1_INCH  [SFE_LOGO_NAME_.1]  19.56,30.23 0 top
LOGO3  QWIIC_LOGO_4MM  [QWIIC_4MM]  9.14,24.13 0 top
LOGO4  OSHW-LOGOMINI  [OSHW-LOGO-MINI]  55.5,13.21 0 bottom
LOGO5  SFE_LOGO_NAME.1_INCH  [SFE_LOGO_NAME_.1]  45.47,30.23 0 top
LOGO6  QWIIC_LOGO_4MM  [QWIIC_4MM]  35.05,24.13 0 top
LOGO7  OSHW-LOGOMINI  [OSHW-LOGO-MINI]  81.41,13.21 0 bottom
LOGO8  SFE_LOGO_NAME.1_INCH  [SFE_LOGO_NAME_.1]  71.37,30.23 0 top
LOGO9  QWIIC_LOGO_4MM  [QWIIC_4MM]  60.96,24.13 0 top
LOGO10  OSHW-LOGOMINI  [OSHW-LOGO-MINI]  107.31,13.21 0 bottom
LOGO11  SFE_LOGO_NAME.1_INCH  [SFE_LOGO_NAME_.1]  97.28,30.23 0 top
LOGO12  QWIIC_LOGO_4MM  [QWIIC_4MM]  86.87,24.13 0 top
LOGO13  OSHW-LOGOMINI  [OSHW-LOGO-MINI]  133.22,13.21 0 bottom
LOGO14  SFE_LOGO_NAME.1_INCH  [SFE_LOGO_NAME_.1]  123.19,30.23 0 top
LOGO15  QWIIC_LOGO_4MM  [QWIIC_4MM]  112.78,24.13 0 top
LOGO16  OSHW-LOGOMINI  [OSHW-LOGO-MINI]  159.13,13.21 0 bottom
LOGO17  SFE_LOGO_NAME.1_INCH  [SFE_LOGO_NAME_.1]  149.1,30.23 0 top
LOGO18  QWIIC_LOGO_4MM  [QWIIC_4MM]  138.68,24.13 0 top
LOGO19  OSHW-LOGOMINI  [OSHW-LOGO-MINI]  29.59,39.12 0 bottom
LOGO20  SFE_LOGO_NAME.1_INCH  [SFE_LOGO_NAME_.1]  19.56,56.13 0 top
LOGO21  QWIIC_LOGO_4MM  [QWIIC_4MM]  9.14,50.04 0 top
LOGO22  OSHW-LOGOMINI  [OSHW-LOGO-MINI]  55.5,39.12 0 bottom
LOGO23  SFE_LOGO_NAME.1_INCH  [SFE_LOGO_NAME_.1]  45.47,56.13 0 top
LOGO24  QWIIC_LOGO_4MM  [QWIIC_4MM]  35.05,50.04 0 top
LOGO25  OSHW-LOGOMINI  [OSHW-LOGO-MINI]  81.41,39.12 0 bottom
LOGO26  SFE_LOGO_NAME.1_INCH  [SFE_LOGO_NAME_.1]  71.37,56.13 0 top
LOGO27  QWIIC_LOGO_4MM  [QWIIC_4MM]  60.96,50.04 0 top
LOGO28  OSHW-LOGOMINI  [OSHW-LOGO-MINI]  107.31,39.12 0 bottom
LOGO29  SFE_LOGO_NAME.1_INCH  [SFE_LOGO_NAME_.1]  97.28,56.13 0 top
LOGO30  QWIIC_LOGO_4MM  [QWIIC_4MM]  86.87,50.04 0 top
LOGO31  OSHW-LOGOMINI  [OSHW-LOGO-MINI]  133.22,39.12 0 bottom
LOGO32  SFE_LOGO_NAME.1_INCH  [SFE_LOGO_NAME_.1]  123.19,56.13 0 top
LOGO33  QWIIC_LOGO_4MM  [QWIIC_4MM]  112.78,50.04 0 top
LOGO34  OSHW-LOGOMINI  [OSHW-LOGO-MINI]  159.13,39.12 0 bottom
LOGO35  SFE_LOGO_NAME.1_INCH  [SFE_LOGO_NAME_.1]  149.1,56.13 0 top
LOGO36  QWIIC_LOGO_4MM  [QWIIC_4MM]  138.68,50.04 0 top
LOGO37  OSHW-LOGOMINI  [OSHW-LOGO-MINI]  29.59,65.02 0 bottom
LOGO38  SFE_LOGO_NAME.1_INCH  [SFE_LOGO_NAME_.1]  19.56,82.04 0 top
LOGO39  QWIIC_LOGO_4MM  [QWIIC_4MM]  9.14,75.95 0 top
LOGO40  OSHW-LOGOMINI  [OSHW-LOGO-MINI]  55.5,65.02 0 bottom
LOGO41  SFE_LOGO_NAME.1_INCH  [SFE_LOGO_NAME_.1]  45.47,82.04 0 top
LOGO42  QWIIC_LOGO_4MM  [QWIIC_4MM]  35.05,75.95 0 top
LOGO43  OSHW-LOGOMINI  [OSHW-LOGO-MINI]  81.41,65.02 0 bottom
LOGO44  SFE_LOGO_NAME.1_INCH  [SFE_LOGO_NAME_.1]  71.37,82.04 0 top
LOGO45  QWIIC_LOGO_4MM  [QWIIC_4MM]  60.96,75.95 0 top
LOGO46  OSHW-LOGOMINI  [OSHW-LOGO-MINI]  107.31,65.02 0 bottom
LOGO47  SFE_LOGO_NAME.1_INCH  [SFE_LOGO_NAME_.1]  97.28,82.04 0 top
LOGO48  QWIIC_LOGO_4MM  [QWIIC_4MM]  86.87,75.95 0 top
LOGO49  OSHW-LOGOMINI  [OSHW-LOGO-MINI]  133.22,65.02 0 bottom
LOGO50  SFE_LOGO_NAME.1_INCH  [SFE_LOGO_NAME_.1]  123.19,82.04 0 top
LOGO51  QWIIC_LOGO_4MM  [QWIIC_4MM]  112.78,75.95 0 top
LOGO52  OSHW-LOGOMINI  [OSHW-LOGO-MINI]  159.13,65.02 0 bottom
LOGO53  SFE_LOGO_NAME.1_INCH  [SFE_LOGO_NAME_.1]  149.1,82.04 0 top
LOGO54  QWIIC_LOGO_4MM  [QWIIC_4MM]  138.68,75.95 0 top
LOGO55  OSHW-LOGOMINI  [OSHW-LOGO-MINI]  29.59,90.93 0 bottom
LOGO56  SFE_LOGO_NAME.1_INCH  [SFE_LOGO_NAME_.1]  19.56,107.95 0 top
LOGO57  QWIIC_LOGO_4MM  [QWIIC_4MM]  9.14,101.85 0 top
LOGO58  OSHW-LOGOMINI  [OSHW-LOGO-MINI]  55.5,90.93 0 bottom
LOGO59  SFE_LOGO_NAME.1_INCH  [SFE_LOGO_NAME_.1]  45.47,107.95 0 top
LOGO60  QWIIC_LOGO_4MM  [QWIIC_4MM]  35.05,101.85 0 top
LOGO61  OSHW-LOGOMINI  [OSHW-LOGO-MINI]  81.41,90.93 0 bottom
LOGO62  SFE_LOGO_NAME.1_INCH  [SFE_LOGO_NAME_.1]  71.37,107.95 0 top
LOGO63  QWIIC_LOGO_4MM  [QWIIC_4MM]  60.96,101.85 0 top
LOGO64  OSHW-LOGOMINI  [OSHW-LOGO-MINI]  107.31,90.93 0 bottom
LOGO65  SFE_LOGO_NAME.1_INCH  [SFE_LOGO_NAME_.1]  97.28,107.95 0 top
LOGO66  QWIIC_LOGO_4MM  [QWIIC_4MM]  86.87,101.85 0 top
LOGO67  OSHW-LOGOMINI  [OSHW-LOGO-MINI]  133.22,90.93 0 bottom
LOGO68  SFE_LOGO_NAME.1_INCH  [SFE_LOGO_NAME_.1]  123.19,107.95 0 top
LOGO69  QWIIC_LOGO_4MM  [QWIIC_4MM]  112.78,101.85 0 top
LOGO70  OSHW-LOGOMINI  [OSHW-LOGO-MINI]  159.13,90.93 0 bottom
LOGO71  SFE_LOGO_NAME.1_INCH  [SFE_LOGO_NAME_.1]  149.1,107.95 0 top
LOGO72  QWIIC_LOGO_4MM  [QWIIC_4MM]  138.68,101.85 0 top
PWR  INT  [SMT-JUMPER_2_NC_TRACE_SILK]  8.89,13.84 0 bottom
PWR1  INT  [SMT-JUMPER_2_NC_TRACE_SILK]  34.8,13.84 0 bottom
PWR2  INT  [SMT-JUMPER_2_NC_TRACE_SILK]  60.71,13.84 0 bottom
PWR3  INT  [SMT-JUMPER_2_NC_TRACE_SILK]  86.61,13.84 0 bottom
PWR4  INT  [SMT-JUMPER_2_NC_TRACE_SILK]  112.52,13.84 0 bottom
PWR5  INT  [SMT-JUMPER_2_NC_TRACE_SILK]  138.43,13.84 0 bottom
PWR6  INT  [SMT-JUMPER_2_NC_TRACE_SILK]  8.89,39.75 0 bottom
PWR7  INT  [SMT-JUMPER_2_NC_TRACE_SILK]  34.8,39.75 0 bottom
PWR8  INT  [SMT-JUMPER_2_NC_TRACE_SILK]  60.71,39.75 0 bottom
PWR9  INT  [SMT-JUMPER_2_NC_TRACE_SILK]  86.61,39.75 0 bottom
PWR10  INT  [SMT-JUMPER_2_NC_TRACE_SILK]  112.52,39.75 0 bottom
PWR11  INT  [SMT-JUMPER_2_NC_TRACE_SILK]  138.43,39.75 0 bottom
PWR12  INT  [SMT-JUMPER_2_NC_TRACE_SILK]  8.89,65.66 0 bottom
PWR13  INT  [SMT-JUMPER_2_NC_TRACE_SILK]  34.8,65.66 0 bottom
PWR14  INT  [SMT-JUMPER_2_NC_TRACE_SILK]  60.71,65.66 0 bottom
PWR15  INT  [SMT-JUMPER_2_NC_TRACE_SILK]  86.61,65.66 0 bottom
PWR16  INT  [SMT-JUMPER_2_NC_TRACE_SILK]  112.52,65.66 0 bottom
PWR17  INT  [SMT-JUMPER_2_NC_TRACE_SILK]  138.43,65.66 0 bottom
PWR18  INT  [SMT-JUMPER_2_NC_TRACE_SILK]  8.89,91.57 0 bottom
PWR19  INT  [SMT-JUMPER_2_NC_TRACE_SILK]  34.8,91.57 0 bottom
PWR20  INT  [SMT-JUMPER_2_NC_TRACE_SILK]  60.71,91.57 0 bottom
PWR21  INT  [SMT-JUMPER_2_NC_TRACE_SILK]  86.61,91.57 0 bottom
PWR22  INT  [SMT-JUMPER_2_NC_TRACE_SILK]  112.52,91.57 0 bottom
PWR23  INT  [SMT-JUMPER_2_NC_TRACE_SILK]  138.43,91.57 0 bottom
R1  10k  [0603]  14.86,19.56 90 top
R2  10k  [0603]  17.53,15.75 0 top
R3  1k  [0603]  9.91,13.97 90 top
R4  2.2k  [0603]  18.29,24.77 90 top
R5  2.2k  [0603]  20.83,24.77 90 top
R6  2.2k  [0603]  44.2,24.77 90 top
R7  2.2k  [0603]  46.74,24.77 90 top
R8  10k  [0603]  40.77,19.56 90 top
R9  10k  [0603]  43.43,15.75 0 top
R10  1k  [0603]  35.81,13.97 90 top
R11  2.2k  [0603]  70.1,24.77 90 top
R12  2.2k  [0603]  72.64,24.77 90 top
R13  10k  [0603]  66.67,19.56 90 top
R14  10k  [0603]  69.34,15.75 0 top
R15  1k  [0603]  61.72,13.97 90 top
R16  2.2k  [0603]  96.01,24.77 90 top
R17  2.2k  [0603]  98.55,24.77 90 top
R18  10k  [0603]  92.58,19.56 90 top
R19  10k  [0603]  95.25,15.75 0 top
R20  1k  [0603]  87.63,13.97 90 top
R21  2.2k  [0603]  121.92,24.77 90 top
R22  2.2k  [0603]  124.46,24.77 90 top
R23  10k  [0603]  118.49,19.56 90 top
R24  10k  [0603]  121.16,15.75 0 top
R25  1k  [0603]  113.54,13.97 90 top
R26  2.2k  [0603]  147.83,24.77 90 top
R27  2.2k  [0603]  150.37,24.77 90 top
R28  10k  [0603]  144.4,19.56 90 top
R29  10k  [0603]  147.07,15.75 0 top
R30  1k  [0603]  139.45,13.97 90 top
R31  2.2k  [0603]  18.29,50.67 90 top
R32  2.2k  [0603]  20.83,50.67 90 top
R33  10k  [0603]  14.86,45.47 90 top
R34  10k  [0603]  17.53,41.66 0 top
R35  1k  [0603]  9.91,39.88 90 top
R36  2.2k  [0603]  44.2,50.67 90 top
R37  2.2k  [0603]  46.74,50.67 90 top
R38  10k  [0603]  40.77,45.47 90 top
R39  10k  [0603]  43.43,41.66 0 top
R40  1k  [0603]  35.81,39.88 90 top
R41  2.2k  [0603]  70.1,50.67 90 top
R42  2.2k  [0603]  72.64,50.67 90 top
R43  10k  [0603]  66.67,45.47 90 top
R44  10k  [0603]  69.34,41.66 0 top
R45  1k  [0603]  61.72,39.88 90 top
R46  2.2k  [0603]  96.01,50.67 90 top
R47  2.2k  [0603]  98.55,50.67 90 top
R48  10k  [0603]  92.58,45.47 90 top
R49  10k  [0603]  95.25,41.66 0 top
R50  1k  [0603]  87.63,39.88 90 top
R51  2.2k  [0603]  121.92,50.67 90 top
R52  2.2k  [0603]  124.46,50.67 90 top
R53  10k  [0603]  118.49,45.47 90 top
R54  10k  [0603]  121.16,41.66 0 top
R55  1k  [0603]  113.54,39.88 90 top
R56  2.2k  [0603]  147.83,50.67 90 top
R57  2.2k  [0603]  150.37,50.67 90 top
R58  10k  [0603]  144.4,45.47 90 top
R59  10k  [0603]  147.07,41.66 0 top
R60  1k  [0603]  139.45,39.88 90 top
R61  2.2k  [0603]  18.29,76.58 90 top
R62  2.2k  [0603]  20.83,76.58 90 top
R63  10k  [0603]  14.86,71.37 90 top
R64  10k  [0603]  17.53,67.56 0 top
R65  1k  [0603]  9.91,65.79 90 top
R66  2.2k  [0603]  44.2,76.58 90 top
R67  2.2k  [0603]  46.74,76.58 90 top
R68  10k  [0603]  40.77,71.37 90 top
R69  10k  [0603]  43.43,67.56 0 top
R70  1k  [0603]  35.81,65.79 90 top
R71  2.2k  [0603]  70.1,76.58 90 top
R72  2.2k  [0603]  72.64,76.58 90 top
R73  10k  [0603]  66.67,71.37 90 top
R74  10k  [0603]  69.34,67.56 0 top
R75  1k  [0603]  61.72,65.79 90 top
R76  2.2k  [0603]  96.01,76.58 90 top
R77  2.2k  [0603]  98.55,76.58 90 top
R78  10k  [0603]  92.58,71.37 90 top
R79  10k  [0603]  95.25,67.56 0 top
R80  1k  [0603]  87.63,65.79 90 top
R81  2.2k  [0603]  121.92,76.58 90 top
R82  2.2k  [0603]  124.46,76.58 90 top
R83  10k  [0603]  118.49,71.37 90 top
R84  10k  [0603]  121.16,67.56 0 top
R85  1k  [0603]  113.54,65.79 90 top
R86  2.2k  [0603]  147.83,76.58 90 top
R87  2.2k  [0603]  150.37,76.58 90 top
R88  10k  [0603]  144.4,71.37 90 top
R89  10k  [0603]  147.07,67.56 0 top
R90  1k  [0603]  139.45,65.79 90 top
R91  2.2k  [0603]  18.29,102.49 90 top
R92  2.2k  [0603]  20.83,102.49 90 top
R93  10k  [0603]  14.86,97.28 90 top
R94  10k  [0603]  17.53,93.47 0 top
R95  1k  [0603]  9.91,91.69 90 top
R96  2.2k  [0603]  44.2,102.49 90 top
R97  2.2k  [0603]  46.74,102.49 90 top
R98  10k  [0603]  40.77,97.28 90 top
R99  10k  [0603]  43.43,93.47 0 top
R100  1k  [0603]  35.81,91.69 90 top
R101  2.2k  [0603]  70.1,102.49 90 top
R102  2.2k  [0603]  72.64,102.49 90 top
R103  10k  [0603]  66.67,97.28 90 top
R104  10k  [0603]  69.34,93.47 0 top
R105  1k  [0603]  61.72,91.69 90 top
R106  2.2k  [0603]  96.01,102.49 90 top
R107  2.2k  [0603]  98.55,102.49 90 top
R108  10k  [0603]  92.58,97.28 90 top
R109  10k  [0603]  95.25,93.47 0 top
R110  1k  [0603]  87.63,91.69 90 top
R111  2.2k  [0603]  121.92,102.49 90 top
R112  2.2k  [0603]  124.46,102.49 90 top
R113  10k  [0603]  118.49,97.28 90 top
R114  10k  [0603]  121.16,93.47 0 top
R115  1k  [0603]  113.54,91.69 90 top
R116  2.2k  [0603]  147.83,102.49 90 top
R117  2.2k  [0603]  150.37,102.49 90 top
R118  10k  [0603]  144.4,97.28 90 top
R119  10k  [0603]  147.07,93.47 0 top
R120  1k  [0603]  139.45,91.69 90 top
U1  VL53L4CX  [VL53L4CX]  19.56,19.56 0 top
U2  VL53L4CX  [VL53L4CX]  45.47,19.56 0 top
U3  VL53L4CX  [VL53L4CX]  71.37,19.56 0 top
U4  VL53L4CX  [VL53L4CX]  97.28,19.56 0 top
U5  VL53L4CX  [VL53L4CX]  123.19,19.56 0 top
U6  VL53L4CX  [VL53L4CX]  149.1,19.56 0 top
U7  VL53L4CX  [VL53L4CX]  19.56,45.47 0 top
U8  VL53L4CX  [VL53L4CX]  45.47,45.47 0 top
U9  VL53L4CX  [VL53L4CX]  71.37,45.47 0 top
U10  VL53L4CX  [VL53L4CX]  97.28,45.47 0 top
U11  VL53L4CX  [VL53L4CX]  123.19,45.47 0 top
U12  VL53L4CX  [VL53L4CX]  149.1,45.47 0 top
U13  VL53L4CX  [VL53L4CX]  19.56,71.37 0 top
U14  VL53L4CX  [VL53L4CX]  45.47,71.37 0 top
U15  VL53L4CX  [VL53L4CX]  71.37,71.37 0 top
U16  VL53L4CX  [VL53L4CX]  97.28,71.37 0 top
U17  VL53L4CX  [VL53L4CX]  123.19,71.37 0 top
U18  VL53L4CX  [VL53L4CX]  149.1,71.37 0 top
U19  VL53L4CX  [VL53L4CX]  19.56,97.28 0 top
U20  VL53L4CX  [VL53L4CX]  45.47,97.28 0 top
U21  VL53L4CX  [VL53L4CX]  71.37,97.28 0 top
U22  VL53L4CX  [VL53L4CX]  97.28,97.28 0 top
U23  VL53L4CX  [VL53L4CX]  123.19,97.28 0 top
U24  VL53L4CX  [VL53L4CX]  149.1,97.28 0 top
U$1  [##INT##7]  23.37,10.54 270 top
U$2  [##SHUT##6]  25.91,11.3 270 top
U$3  [#3V3#1]  15.75,10.79 270 top
U$4  [#GND#0]  13.21,10.92 270 top
U$5  [#I2C#56]  19.43,26.29 0 bottom
U$6  [#SCL#4]  20.83,10.67 270 top
U$7  [#SDA#5]  18.29,10.79 270 top
U$8  [DISTANCE_SENSOR8]  19.56,28.32 0 top
U$9  [VL53L4CD0]  19.56,26.92 0 top
U$10  [#LED#54]  11.43,13.84 0 bottom
U$11  [#INT#55]  17.02,19.56 0 bottom
U$12  [##INT##7]  23.37,10.54 90 bottom
U$13  [##SHUT##6]  25.91,11.3 90 bottom
U$14  [#3V3#1]  15.75,10.79 90 bottom
U$15  [#GND#0]  13.21,10.92 90 bottom
U$16  [#SCL#4]  20.83,10.67 90 bottom
U$17  [#SDA#5]  18.29,10.79 90 bottom
U$18  [DISTANCE_SENSOR8]  19.3,30.86 0 bottom
U$19  [##INT##7]  49.28,10.54 270 top
U$20  [DEF_ADDR#54]  21.08,27.81 0 bottom
U$21  [0X2955]  16.51,27.81 0 bottom
U$22  [SFE_LOGO_FLAME_.1]  12.45,29.34 0 bottom
U$23  [PWR55]  11.18,13.97 270 top
U$24  [VL53L4CD0]  19.3,29.34 0 bottom
U$25  [##SHUT##6]  51.82,11.3 270 top
U$26  [#3V3#1]  41.66,10.79 270 top
U$27  [#GND#0]  39.12,10.92 270 top
U$28  [#I2C#56]  45.34,26.29 0 bottom
U$29  [#SCL#4]  46.74,10.67 270 top
U$30  [#SDA#5]  44.2,10.79 270 top
U$31  [DISTANCE_SENSOR8]  45.47,28.32 0 top
U$32  [#LED#54]  37.34,13.84 0 bottom
U$33  [#INT#55]  42.93,19.56 0 bottom
U$34  [##INT##7]  49.28,10.54 90 bottom
U$35  [##SHUT##6]  51.82,11.3 90 bottom
U$36  [#3V3#1]  41.66,10.79 90 bottom
U$37  [#GND#0]  39.12,10.92 90 bottom
U$38  [#SCL#4]  46.74,10.67 90 bottom
U$39  [#SDA#5]  44.2,10.79 90 bottom
U$40  [DISTANCE_SENSOR8]  45.21,30.86 0 bottom
U$41  [DEF_ADDR#54]  46.99,27.81 0 bottom
U$42  [0X2955]  42.42,27.81 0 bottom
U$43  [SFE_LOGO_FLAME_.1]  38.35,29.34 0 bottom
U$44  [PWR55]  37.08,13.97 270 top
U$45  [VL53L4CD0]  45.47,26.92 0 top
U$46  [VL53L4CD0]  45.21,29.34 0 bottom
U$47  [##INT##7]  75.18,10.54 270 top
U$48  [##SHUT##6]  77.72,11.3 270 top
U$49  [#3V3#1]  67.56,10.79 270 top
U$50  [#GND#0]  65.02,10.92 270 top
U$51  [#I2C#56]  71.25,26.29 0 bottom
U$52  [#SCL#4]  72.64,10.67 270 top
U$53  [#SDA#5]  70.1,10.79 270 top
U$54  [DISTANCE_SENSOR8]  71.37,28.32 0 top
U$55  [#LED#54]  63.25,13.84 0 bottom
U$56  [#INT#55]  68.83,19.56 0 bottom
U$57  [##INT##7]  75.18,10.54 90 bottom
U$58  [##SHUT##6]  77.72,11.3 90 bottom
U$59  [#3V3#1]  67.56,10.79 90 bottom
U$60  [#GND#0]  65.02,10.92 90 bottom
U$61  [#SCL#4]  72.64,10.67 90 bottom
U$62  [#SDA#5]  70.1,10.79 90 bottom
U$63  [DISTANCE_SENSOR8]  71.12,30.86 0 bottom
U$64  [DEF_ADDR#54]  72.9,27.81 0 bottom
U$65  [0X2955]  68.33,27.81 0 bottom
U$66  [SFE_LOGO_FLAME_.1]  64.26,29.34 0 bottom
U$67  [PWR55]  62.99,13.97 270 top
U$68  [VL53L4CD0]  71.37,26.92 0 top
U$69  [VL53L4CD0]  71.12,29.34 0 bottom
U$70  [##INT##7]  101.09,10.54 270 top
U$71  [##SHUT##6]  103.63,11.3 270 top
U$72  [#3V3#1]  93.47,10.79 270 top
U$73  [#GND#0]  90.93,10.92 270 top
U$74  [#I2C#56]  97.16,26.29 0 bottom
U$75  [#SCL#4]  98.55,10.67 270 top
U$76  [#SDA#5]  96.01,10.79 270 top
U$77  [DISTANCE_SENSOR8]  97.28,28.32 0 top
U$78  [#LED#54]  89.15,13.84 0 bottom
U$79  [#INT#55]  94.74,19.56 0 bottom
U$80  [##INT##7]  101.09,10.54 90 bottom
U$81  [##SHUT##6]  103.63,11.3 90 bottom
U$82  [#3V3#1]  93.47,10.79 90 bottom
U$83  [#GND#0]  90.93,10.92 90 bottom
U$84  [#SCL#4]  98.55,10.67 90 bottom
U$85  [#SDA#5]  96.01,10.79 90 bottom
U$86  [DISTANCE_SENSOR8]  97.03,30.86 0 bottom
U$87  [DEF_ADDR#54]  98.81,27.81 0 bottom
U$88  [0X2955]  94.23,27.81 0 bottom
U$89  [SFE_LOGO_FLAME_.1]  90.17,29.34 0 bottom
U$90  [PWR55]  88.9,13.97 270 top
U$91  [VL53L4CD0]  97.28,26.92 0 top
U$92  [VL53L4CD0]  97.03,29.34 0 bottom
U$93  [##INT##7]  127,10.54 270 top
U$94  [##SHUT##6]  129.54,11.3 270 top
U$95  [#3V3#1]  119.38,10.79 270 top
U$96  [#GND#0]  116.84,10.92 270 top
U$97  [#I2C#56]  123.06,26.29 0 bottom
U$98  [#SCL#4]  124.46,10.67 270 top
U$99  [#SDA#5]  121.92,10.79 270 top
U$100  [DISTANCE_SENSOR8]  123.19,28.32 0 top
U$101  [#LED#54]  115.06,13.84 0 bottom
U$102  [#INT#55]  120.65,19.56 0 bottom
U$103  [##INT##7]  127,10.54 90 bottom
U$104  [##SHUT##6]  129.54,11.3 90 bottom
U$105  [#3V3#1]  119.38,10.79 90 bottom
U$106  [#GND#0]  116.84,10.92 90 bottom
U$107  [#SCL#4]  124.46,10.67 90 bottom
U$108  [#SDA#5]  121.92,10.79 90 bottom
U$109  [DISTANCE_SENSOR8]  122.94,30.86 0 bottom
U$110  [DEF_ADDR#54]  124.71,27.81 0 bottom
U$111  [0X2955]  120.14,27.81 0 bottom
U$112  [SFE_LOGO_FLAME_.1]  116.08,29.34 0 bottom
U$113  [PWR55]  114.81,13.97 270 top
U$114  [VL53L4CD0]  123.19,26.92 0 top
U$115  [VL53L4CD0]  122.94,29.34 0 bottom
U$116  [##INT##7]  152.91,10.54 270 top
U$117  [##SHUT##6]  155.45,11.3 270 top
U$118  [#3V3#1]  145.29,10.79 270 top
U$119  [#GND#0]  142.75,10.92 270 top
U$120  [#I2C#56]  148.97,26.29 0 bottom
U$121  [#SCL#4]  150.37,10.67 270 top
U$122  [#SDA#5]  147.83,10.79 270 top
U$123  [DISTANCE_SENSOR8]  149.1,28.32 0 top
U$124  [#LED#54]  140.97,13.84 0 bottom
U$125  [#INT#55]  146.56,19.56 0 bottom
U$126  [##INT##7]  152.91,10.54 90 bottom
U$127  [##SHUT##6]  155.45,11.3 90 bottom
U$128  [#3V3#1]  145.29,10.79 90 bottom
U$129  [#GND#0]  142.75,10.92 90 bottom
U$130  [#SCL#4]  150.37,10.67 90 bottom
U$131  [#SDA#5]  147.83,10.79 90 bottom
U$132  [DISTANCE_SENSOR8]  148.84,30.86 0 bottom
U$133  [DEF_ADDR#54]  150.62,27.81 0 bottom
U$134  [0X2955]  146.05,27.81 0 bottom
U$135  [SFE_LOGO_FLAME_.1]  141.99,29.34 0 bottom
U$136  [PWR55]  140.72,13.97 270 top
U$137  [VL53L4CD0]  149.1,26.92 0 top
U$138  [VL53L4CD0]  148.84,29.34 0 bottom
U$139  [##INT##7]  23.37,36.45 270 top
U$140  [##SHUT##6]  25.91,37.21 270 top
U$141  [#3V3#1]  15.75,36.7 270 top
U$142  [#GND#0]  13.21,36.83 270 top
U$143  [#I2C#56]  19.43,52.2 0 bottom
U$144  [#SCL#4]  20.83,36.58 270 top
U$145  [#SDA#5]  18.29,36.7 270 top
U$146  [DISTANCE_SENSOR8]  19.56,54.23 0 top
U$147  [#LED#54]  11.43,39.75 0 bottom
U$148  [#INT#55]  17.02,45.47 0 bottom
U$149  [##INT##7]  23.37,36.45 90 bottom
U$150  [##SHUT##6]  25.91,37.21 90 bottom
U$151  [#3V3#1]  15.75,36.7 90 bottom
U$152  [#GND#0]  13.21,36.83 90 bottom
U$153  [#SCL#4]  20.83,36.58 90 bottom
U$154  [#SDA#5]  18.29,36.7 90 bottom
U$155  [DISTANCE_SENSOR8]  19.3,56.77 0 bottom
U$156  [DEF_ADDR#54]  21.08,53.72 0 bottom
U$157  [0X2955]  16.51,53.72 0 bottom
U$158  [SFE_LOGO_FLAME_.1]  12.45,55.24 0 bottom
U$159  [PWR55]  11.18,39.88 270 top
U$160  [VL53L4CD0]  19.56,52.83 0 top
U$161  [VL53L4CD0]  19.3,55.24 0 bottom
U$162  [##INT##7]  49.28,36.45 270 top
U$163  [##SHUT##6]  51.82,37.21 270 top
U$164  [#3V3#1]  41.66,36.7 270 top
U$165  [#GND#0]  39.12,36.83 270 top
U$166  [#I2C#56]  45.34,52.2 0 bottom
U$167  [#SCL#4]  46.74,36.58 270 top
U$168  [#SDA#5]  44.2,36.7 270 top
U$169  [DISTANCE_SENSOR8]  45.47,54.23 0 top
U$170  [#LED#54]  37.34,39.75 0 bottom
U$171  [#INT#55]  42.93,45.47 0 bottom
U$172  [##INT##7]  49.28,36.45 90 bottom
U$173  [##SHUT##6]  51.82,37.21 90 bottom
U$174  [#3V3#1]  41.66,36.7 90 bottom
U$175  [#GND#0]  39.12,36.83 90 bottom
U$176  [#SCL#4]  46.74,36.58 90 bottom
U$177  [#SDA#5]  44.2,36.7 90 bottom
U$178  [DISTANCE_SENSOR8]  45.21,56.77 0 bottom
U$179  [DEF_ADDR#54]  46.99,53.72 0 bottom
U$180  [0X2955]  42.42,53.72 0 bottom
U$181  [SFE_LOGO_FLAME_.1]  38.35,55.24 0 bottom
U$182  [PWR55]  37.08,39.88 270 top
U$183  [VL53L4CD0]  45.47,52.83 0 top
U$184  [VL53L4CD0]  45.21,55.24 0 bottom
U$185  [##INT##7]  75.18,36.45 270 top
U$186  [##SHUT##6]  77.72,37.21 270 top
U$187  [#3V3#1]  67.56,36.7 270 top
U$188  [#GND#0]  65.02,36.83 270 top
U$189  [#I2C#56]  71.25,52.2 0 bottom
U$190  [#SCL#4]  72.64,36.58 270 top
U$191  [#SDA#5]  70.1,36.7 270 top
U$192  [DISTANCE_SENSOR8]  71.37,54.23 0 top
U$193  [#LED#54]  63.25,39.75 0 bottom
U$194  [#INT#55]  68.83,45.47 0 bottom
U$195  [##INT##7]  75.18,36.45 90 bottom
U$196  [##SHUT##6]  77.72,37.21 90 bottom
U$197  [#3V3#1]  67.56,36.7 90 bottom
U$198  [#GND#0]  65.02,36.83 90 bottom
U$199  [#SCL#4]  72.64,36.58 90 bottom
U$200  [#SDA#5]  70.1,36.7 90 bottom
U$201  [DISTANCE_SENSOR8]  71.12,56.77 0 bottom
U$202  [DEF_ADDR#54]  72.9,53.72 0 bottom
U$203  [0X2955]  68.33,53.72 0 bottom
U$204  [SFE_LOGO_FLAME_.1]  64.26,55.24 0 bottom
U$205  [PWR55]  62.99,39.88 270 top
U$206  [VL53L4CD0]  71.37,52.83 0 top
U$207  [VL53L4CD0]  71.12,55.24 0 bottom
U$208  [##INT##7]  101.09,36.45 270 top
U$209  [##SHUT##6]  103.63,37.21 270 top
U$210  [#3V3#1]  93.47,36.7 270 top
U$211  [#GND#0]  90.93,36.83 270 top
U$212  [#I2C#56]  97.16,52.2 0 bottom
U$213  [#SCL#4]  98.55,36.58 270 top
U$214  [#SDA#5]  96.01,36.7 270 top
U$215  [DISTANCE_SENSOR8]  97.28,54.23 0 top
U$216  [#LED#54]  89.15,39.75 0 bottom
U$217  [#INT#55]  94.74,45.47 0 bottom
U$218  [##INT##7]  101.09,36.45 90 bottom
U$219  [##SHUT##6]  103.63,37.21 90 bottom
U$220  [#3V3#1]  93.47,36.7 90 bottom
U$221  [#GND#0]  90.93,36.83 90 bottom
U$222  [#SCL#4]  98.55,36.58 90 bottom
U$223  [#SDA#5]  96.01,36.7 90 bottom
U$224  [DISTANCE_SENSOR8]  97.03,56.77 0 bottom
U$225  [DEF_ADDR#54]  98.81,53.72 0 bottom
U$226  [0X2955]  94.23,53.72 0 bottom
U$227  [SFE_LOGO_FLAME_.1]  90.17,55.24 0 bottom
U$228  [PWR55]  88.9,39.88 270 top
U$229  [VL53L4CD0]  97.28,52.83 0 top
U$230  [VL53L4CD0]  97.03,55.24 0 bottom
U$231  [##INT##7]  127,36.45 270 top
U$232  [##SHUT##6]  129.54,37.21 270 top
U$233  [#3V3#1]  119.38,36.7 270 top
U$234  [#GND#0]  116.84,36.83 270 top
U$235  [#I2C#56]  123.06,52.2 0 bottom
U$236  [#SCL#4]  124.46,36.58 270 top
U$237  [#SDA#5]  121.92,36.7 270 top
U$238  [DISTANCE_SENSOR8]  123.19,54.23 0 top
U$239  [#LED#54]  115.06,39.75 0 bottom
U$240  [#INT#55]  120.65,45.47 0 bottom
U$241  [##INT##7]  127,36.45 90 bottom
U$242  [##SHUT##6]  129.54,37.21 90 bottom
U$243  [#3V3#1]  119.38,36.7 90 bottom
U$244  [#GND#0]  116.84,36.83 90 bottom
U$245  [#SCL#4]  124.46,36.58 90 bottom
U$246  [#SDA#5]  121.92,36.7 90 bottom
U$247  [DISTANCE_SENSOR8]  122.94,56.77 0 bottom
U$248  [DEF_ADDR#54]  124.71,53.72 0 bottom
U$249  [0X2955]  120.14,53.72 0 bottom
U$250  [SFE_LOGO_FLAME_.1]  116.08,55.24 0 bottom
U$251  [PWR55]  114.81,39.88 270 top
U$252  [VL53L4CD0]  123.19,52.83 0 top
U$253  [VL53L4CD0]  122.94,55.24 0 bottom
U$254  [##INT##7]  152.91,36.45 270 top
U$255  [##SHUT##6]  155.45,37.21 270 top
U$256  [#3V3#1]  145.29,36.7 270 top
U$257  [#GND#0]  142.75,36.83 270 top
U$258  [#I2C#56]  148.97,52.2 0 bottom
U$259  [#SCL#4]  150.37,36.58 270 top
U$260  [#SDA#5]  147.83,36.7 270 top
U$261  [DISTANCE_SENSOR8]  149.1,54.23 0 top
U$262  [#LED#54]  140.97,39.75 0 bottom
U$263  [#INT#55]  146.56,45.47 0 bottom
U$264  [##INT##7]  152.91,36.45 90 bottom
U$265  [##SHUT##6]  155.45,37.21 90 bottom
U$266  [#3V3#1]  145.29,36.7 90 bottom
U$267  [#GND#0]  142.75,36.83 90 bottom
U$268  [#SCL#4]  150.37,36.58 90 bottom
U$269  [#SDA#5]  147.83,36.7 90 bottom
U$270  [DISTANCE_SENSOR8]  148.84,56.77 0 bottom
U$271  [DEF_ADDR#54]  150.62,53.72 0 bottom
U$272  [0X2955]  146.05,53.72 0 bottom
U$273  [SFE_LOGO_FLAME_.1]  141.99,55.24 0 bottom
U$274  [PWR55]  140.72,39.88 270 top
U$275  [VL53L4CD0]  149.1,52.83 0 top
U$276  [VL53L4CD0]  148.84,55.24 0 bottom
U$277  [##INT##7]  23.37,62.36 270 top
U$278  [##SHUT##6]  25.91,63.12 270 top
U$279  [#3V3#1]  15.75,62.61 270 top
U$280  [#GND#0]  13.21,62.74 270 top
U$281  [#I2C#56]  19.43,78.11 0 bottom
U$282  [#SCL#4]  20.83,62.48 270 top
U$283  [#SDA#5]  18.29,62.61 270 top
U$284  [DISTANCE_SENSOR8]  19.56,80.14 0 top
U$285  [#LED#54]  11.43,65.66 0 bottom
U$286  [#INT#55]  17.02,71.37 0 bottom
U$287  [##INT##7]  23.37,62.36 90 bottom
U$288  [##SHUT##6]  25.91,63.12 90 bottom
U$289  [#3V3#1]  15.75,62.61 90 bottom
U$290  [#GND#0]  13.21,62.74 90 bottom
U$291  [#SCL#4]  20.83,62.48 90 bottom
U$292  [#SDA#5]  18.29,62.61 90 bottom
U$293  [DISTANCE_SENSOR8]  19.3,82.68 0 bottom
U$294  [DEF_ADDR#54]  21.08,79.63 0 bottom
U$295  [0X2955]  16.51,79.63 0 bottom
U$296  [SFE_LOGO_FLAME_.1]  12.45,81.15 0 bottom
U$297  [PWR55]  11.18,65.79 270 top
U$298  [VL53L4CD0]  19.56,78.74 0 top
U$299  [VL53L4CD0]  19.3,81.15 0 bottom
U$300  [##INT##7]  49.28,62.36 270 top
U$301  [##SHUT##6]  51.82,63.12 270 top
U$302  [#3V3#1]  41.66,62.61 270 top
U$303  [#GND#0]  39.12,62.74 270 top
U$304  [#I2C#56]  45.34,78.11 0 bottom
U$305  [#SCL#4]  46.74,62.48 270 top
U$306  [#SDA#5]  44.2,62.61 270 top
U$307  [DISTANCE_SENSOR8]  45.47,80.14 0 top
U$308  [#LED#54]  37.34,65.66 0 bottom
U$309  [#INT#55]  42.93,71.37 0 bottom
U$310  [##INT##7]  49.28,62.36 90 bottom
U$311  [##SHUT##6]  51.82,63.12 90 bottom
U$312  [#3V3#1]  41.66,62.61 90 bottom
U$313  [#GND#0]  39.12,62.74 90 bottom
U$314  [#SCL#4]  46.74,62.48 90 bottom
U$315  [#SDA#5]  44.2,62.61 90 bottom
U$316  [DISTANCE_SENSOR8]  45.21,82.68 0 bottom
U$317  [DEF_ADDR#54]  46.99,79.63 0 bottom
U$318  [0X2955]  42.42,79.63 0 bottom
U$319  [SFE_LOGO_FLAME_.1]  38.35,81.15 0 bottom
U$320  [PWR55]  37.08,65.79 270 top
U$321  [VL53L4CD0]  45.47,78.74 0 top
U$322  [VL53L4CD0]  45.21,81.15 0 bottom
U$323  [##INT##7]  75.18,62.36 270 top
U$324  [##SHUT##6]  77.72,63.12 270 top
U$325  [#3V3#1]  67.56,62.61 270 top
U$326  [#GND#0]  65.02,62.74 270 top
U$327  [#I2C#56]  71.25,78.11 0 bottom
U$328  [#SCL#4]  72.64,62.48 270 top
U$329  [#SDA#5]  70.1,62.61 270 top
U$330  [DISTANCE_SENSOR8]  71.37,80.14 0 top
U$331  [#LED#54]  63.25,65.66 0 bottom
U$332  [#INT#55]  68.83,71.37 0 bottom
U$333  [##INT##7]  75.18,62.36 90 bottom
U$334  [##SHUT##6]  77.72,63.12 90 bottom
U$335  [#3V3#1]  67.56,62.61 90 bottom
U$336  [#GND#0]  65.02,62.74 90 bottom
U$337  [#SCL#4]  72.64,62.48 90 bottom
U$338  [#SDA#5]  70.1,62.61 90 bottom
U$339  [DISTANCE_SENSOR8]  71.12,82.68 0 bottom
U$340  [DEF_ADDR#54]  72.9,79.63 0 bottom
U$341  [0X2955]  68.33,79.63 0 bottom
U$342  [SFE_LOGO_FLAME_.1]  64.26,81.15 0 bottom
U$343  [PWR55]  62.99,65.79 270 top
U$344  [VL53L4CD0]  71.37,78.74 0 top
U$345  [VL53L4CD0]  71.12,81.15 0 bottom
U$346  [##INT##7]  101.09,62.36 270 top
U$347  [##SHUT##6]  103.63,63.12 270 top
U$348  [#3V3#1]  93.47,62.61 270 top
U$349  [#GND#0]  90.93,62.74 270 top
U$350  [#I2C#56]  97.16,78.11 0 bottom
U$351  [#SCL#4]  98.55,62.48 270 top
U$352  [#SDA#5]  96.01,62.61 270 top
U$353  [DISTANCE_SENSOR8]  97.28,80.14 0 top
U$354  [#LED#54]  89.15,65.66 0 bottom
U$355  [#INT#55]  94.74,71.37 0 bottom
U$356  [##INT##7]  101.09,62.36 90 bottom
U$357  [##SHUT##6]  103.63,63.12 90 bottom
U$358  [#3V3#1]  93.47,62.61 90 bottom
U$359  [#GND#0]  90.93,62.74 90 bottom
U$360  [#SCL#4]  98.55,62.48 90 bottom
U$361  [#SDA#5]  96.01,62.61 90 bottom
U$362  [DISTANCE_SENSOR8]  97.03,82.68 0 bottom
U$363  [DEF_ADDR#54]  98.81,79.63 0 bottom
U$364  [0X2955]  94.23,79.63 0 bottom
U$365  [SFE_LOGO_FLAME_.1]  90.17,81.15 0 bottom
U$366  [PWR55]  88.9,65.79 270 top
U$367  [VL53L4CD0]  97.28,78.74 0 top
U$368  [VL53L4CD0]  97.03,81.15 0 bottom
U$369  [##INT##7]  127,62.36 270 top
U$370  [##SHUT##6]  129.54,63.12 270 top
U$371  [#3V3#1]  119.38,62.61 270 top
U$372  [#GND#0]  116.84,62.74 270 top
U$373  [#I2C#56]  123.06,78.11 0 bottom
U$374  [#SCL#4]  124.46,62.48 270 top
U$375  [#SDA#5]  121.92,62.61 270 top
U$376  [DISTANCE_SENSOR8]  123.19,80.14 0 top
U$377  [#LED#54]  115.06,65.66 0 bottom
U$378  [#INT#55]  120.65,71.37 0 bottom
U$379  [##INT##7]  127,62.36 90 bottom
U$380  [##SHUT##6]  129.54,63.12 90 bottom
U$381  [#3V3#1]  119.38,62.61 90 bottom
U$382  [#GND#0]  116.84,62.74 90 bottom
U$383  [#SCL#4]  124.46,62.48 90 bottom
U$384  [#SDA#5]  121.92,62.61 90 bottom